# Altium PCB SLT.PcbDoc (part 1 of 8)
Units mm, origin at the board's own origin, x right, y up, seen from the top; angles counter-clockwise.
Board outline 150 x 66 mm, 6 copper layers (L1 TOP, L2 GND 1, L3 SIGNAL, L4 PWR, L5 GND 2, L6 BOT), stack 1.598 mm thick; 797 components, 541 nets, 2680 pads, 2120 vias.
Unrouted connection lines stored in the file: 31.
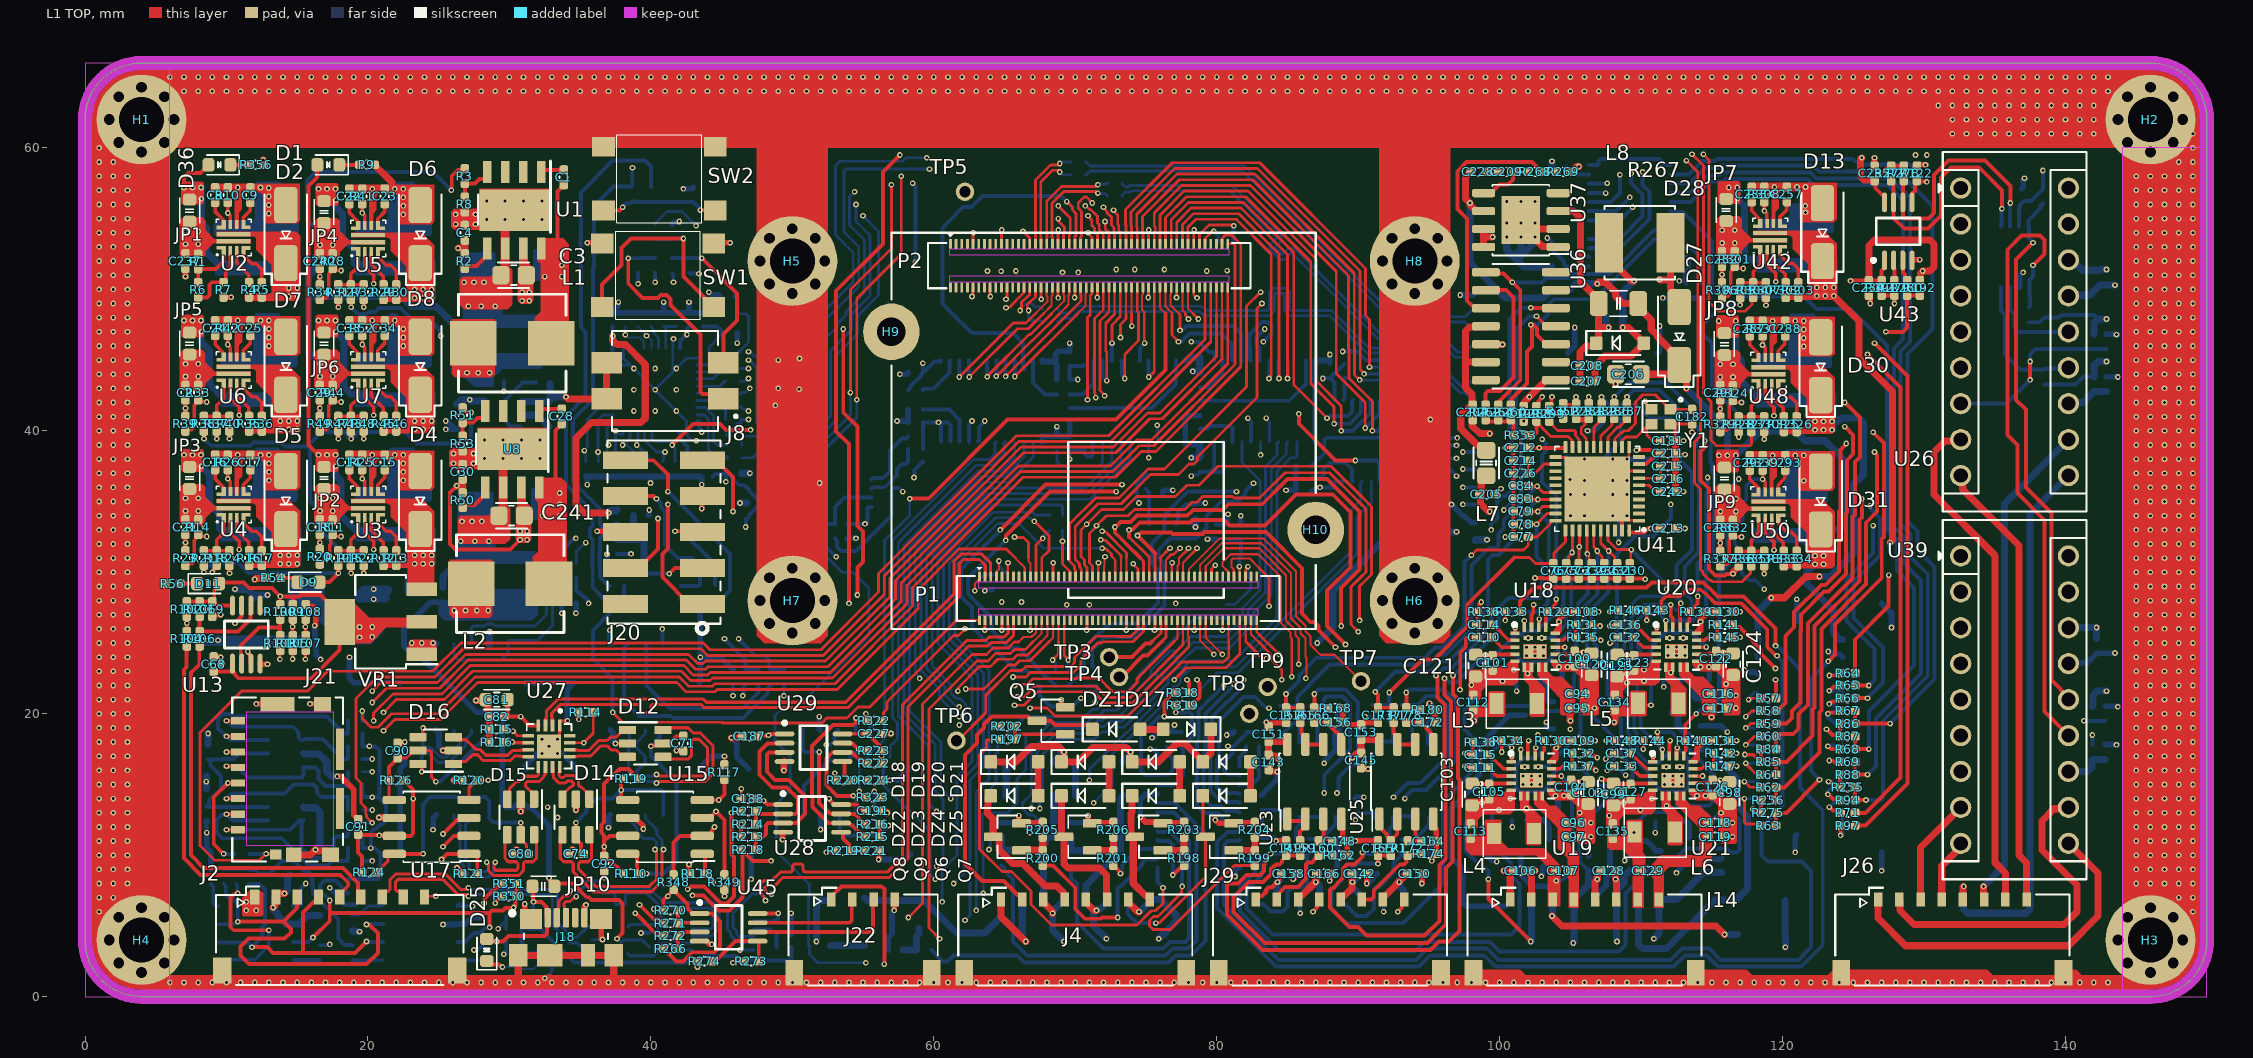
[diagram p0: L1 TOP view]
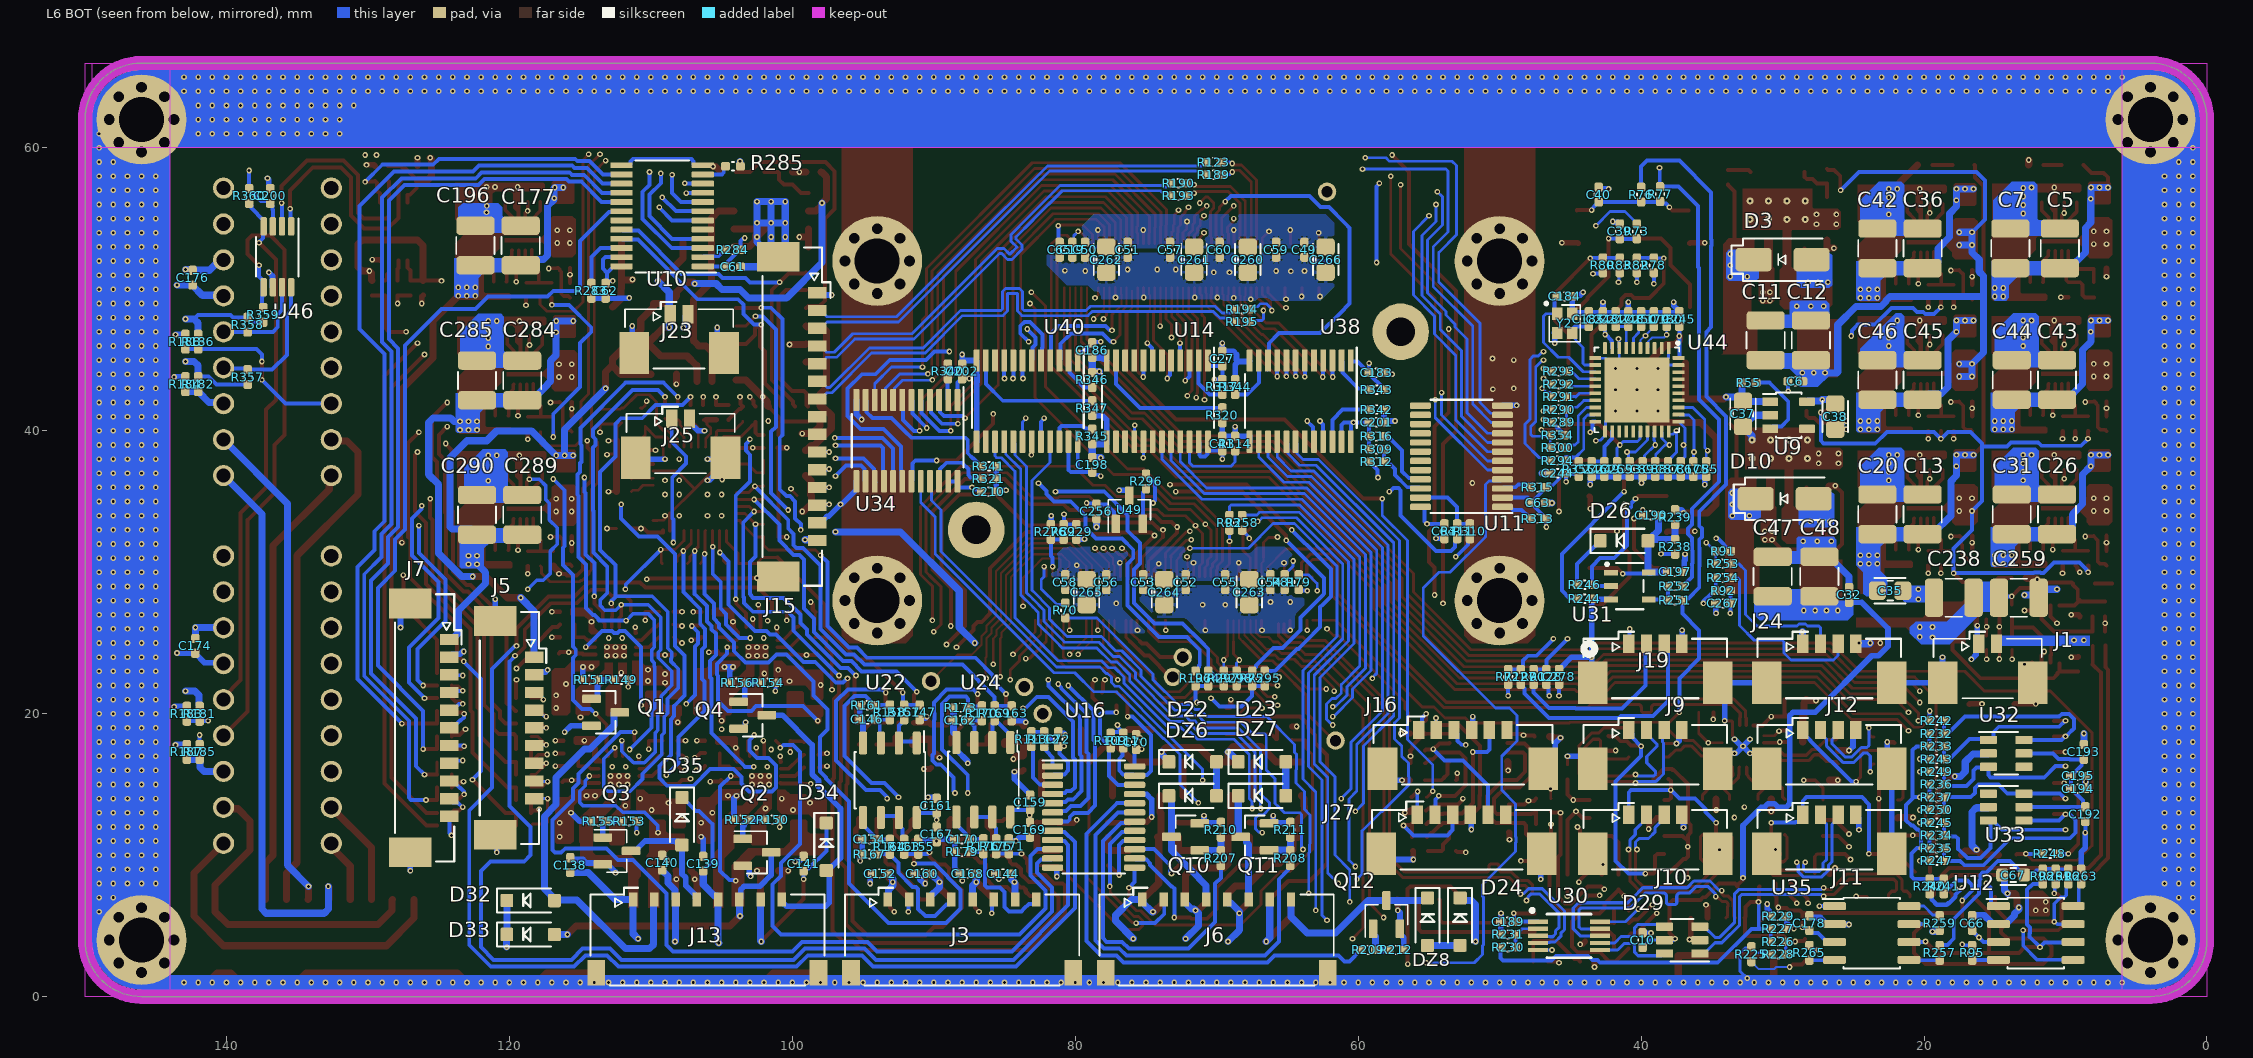
[diagram p1: L6 BOT view, seen from below]
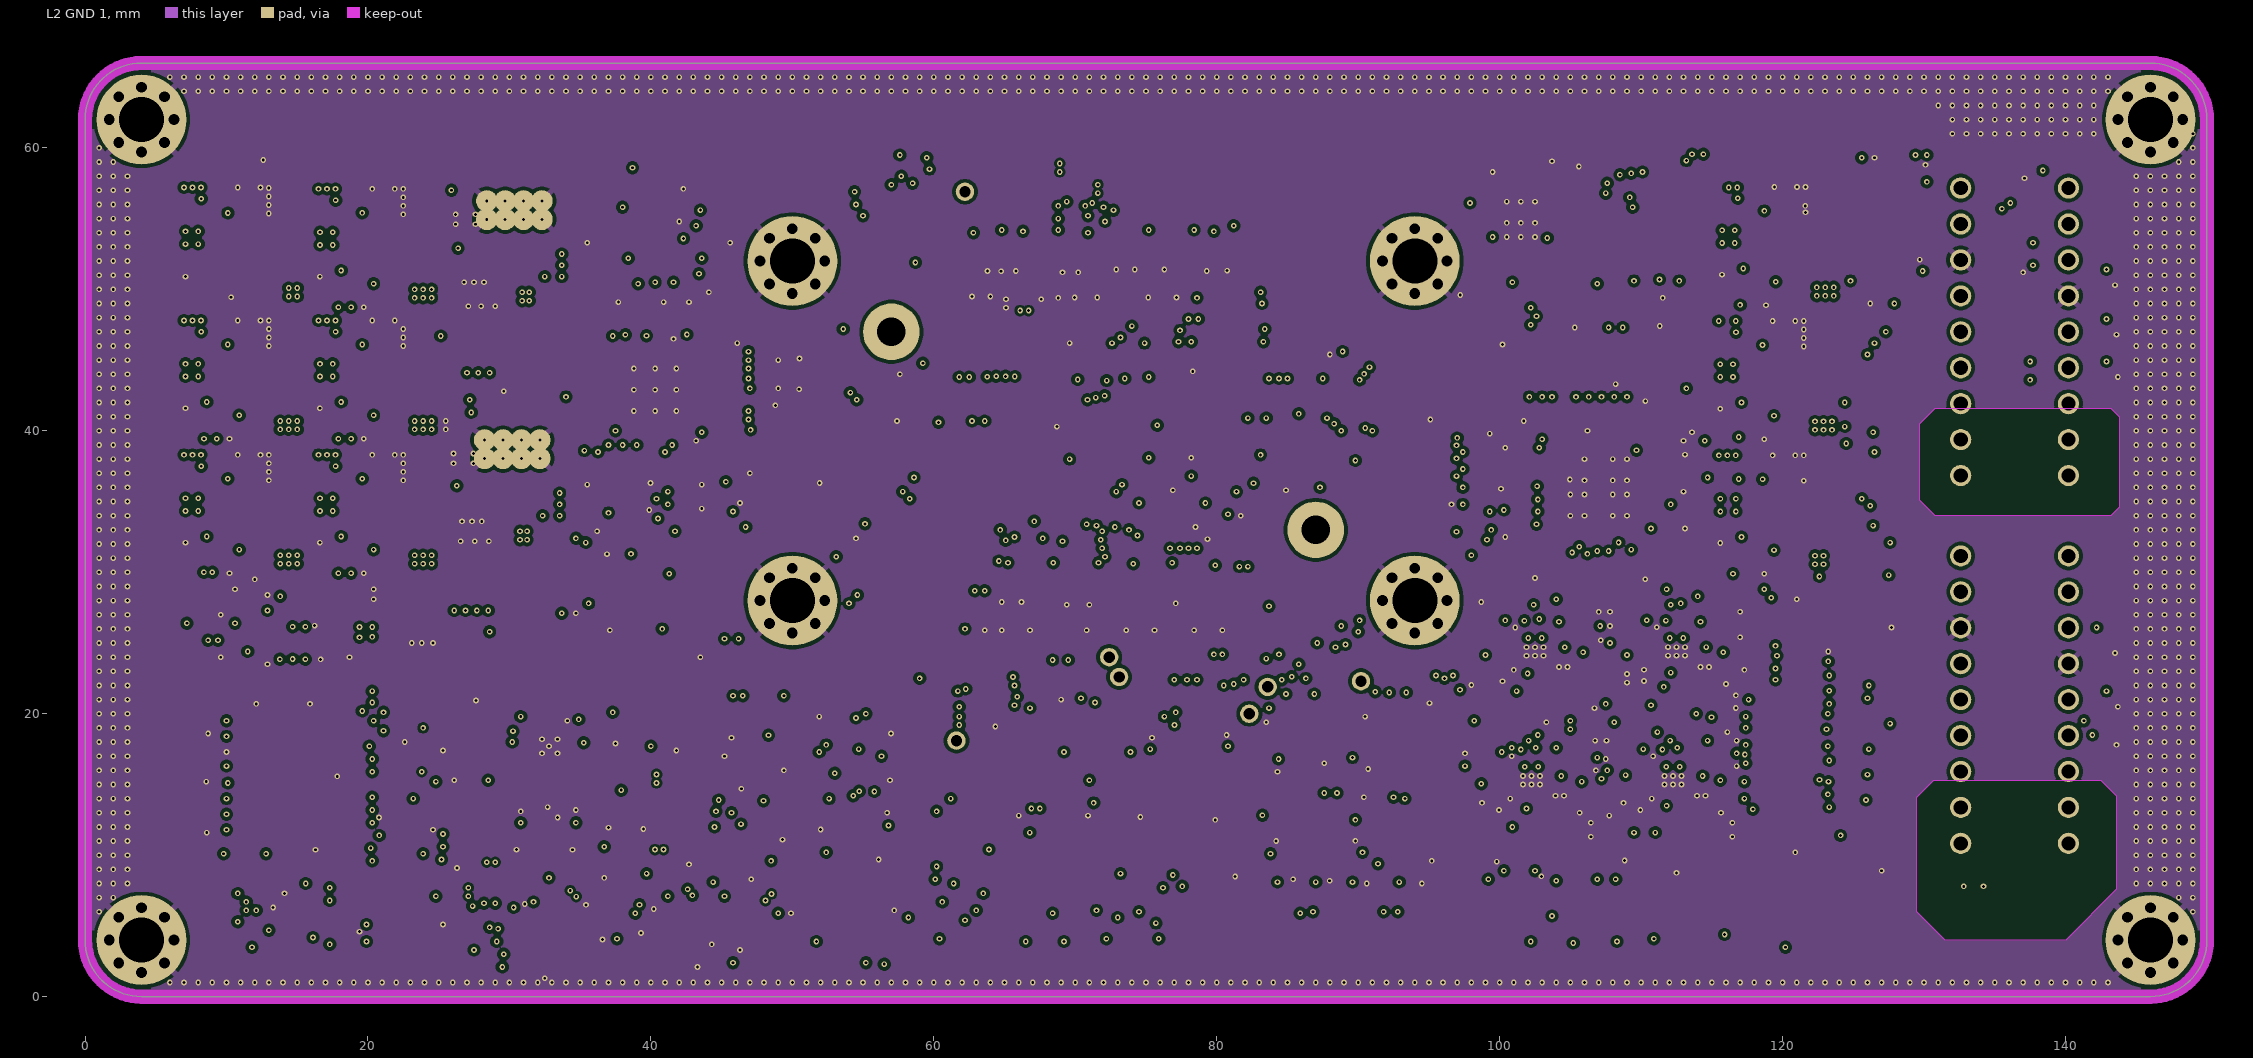
[diagram p2: L2 GND 1]
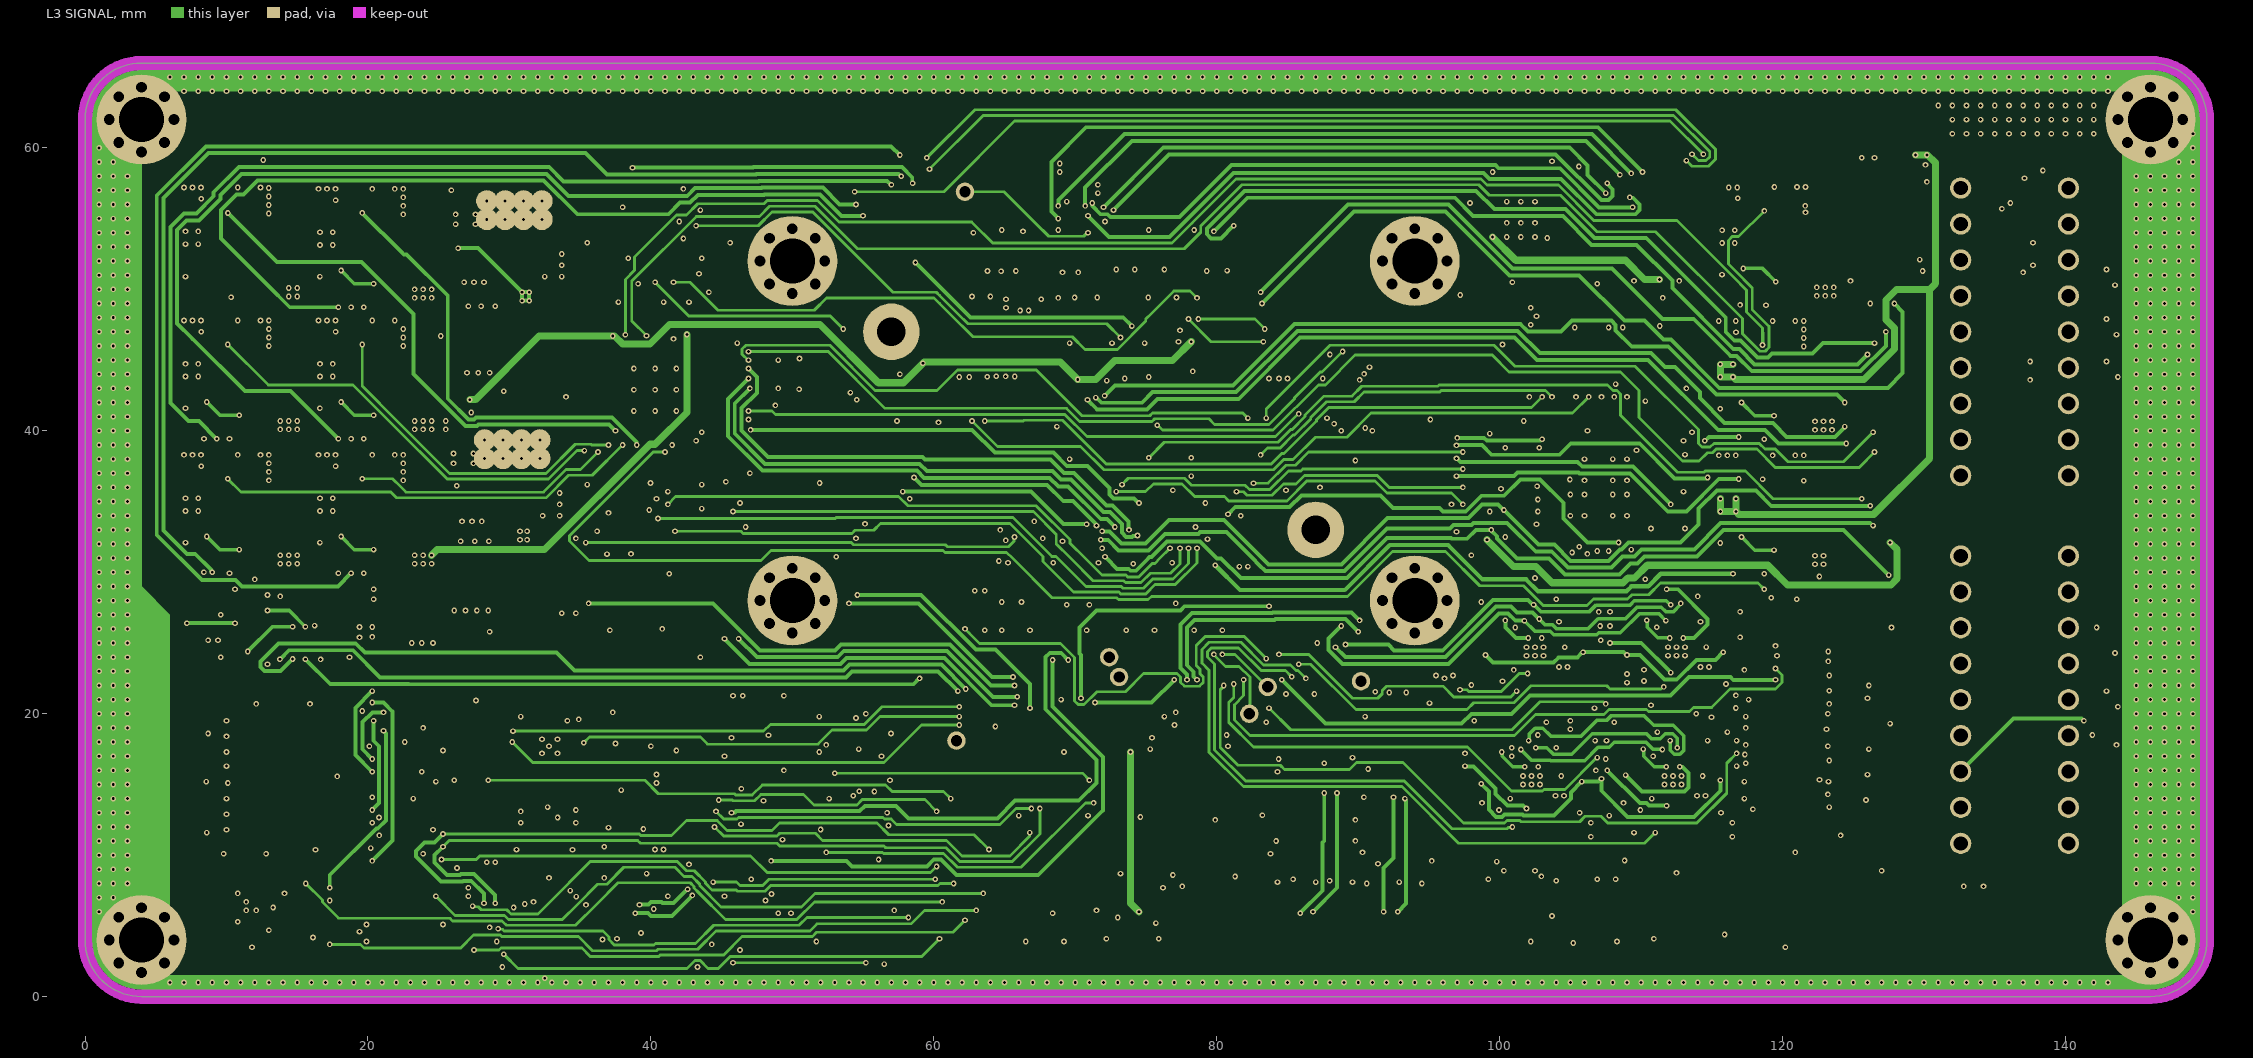
[diagram p3: L3 SIGNAL]
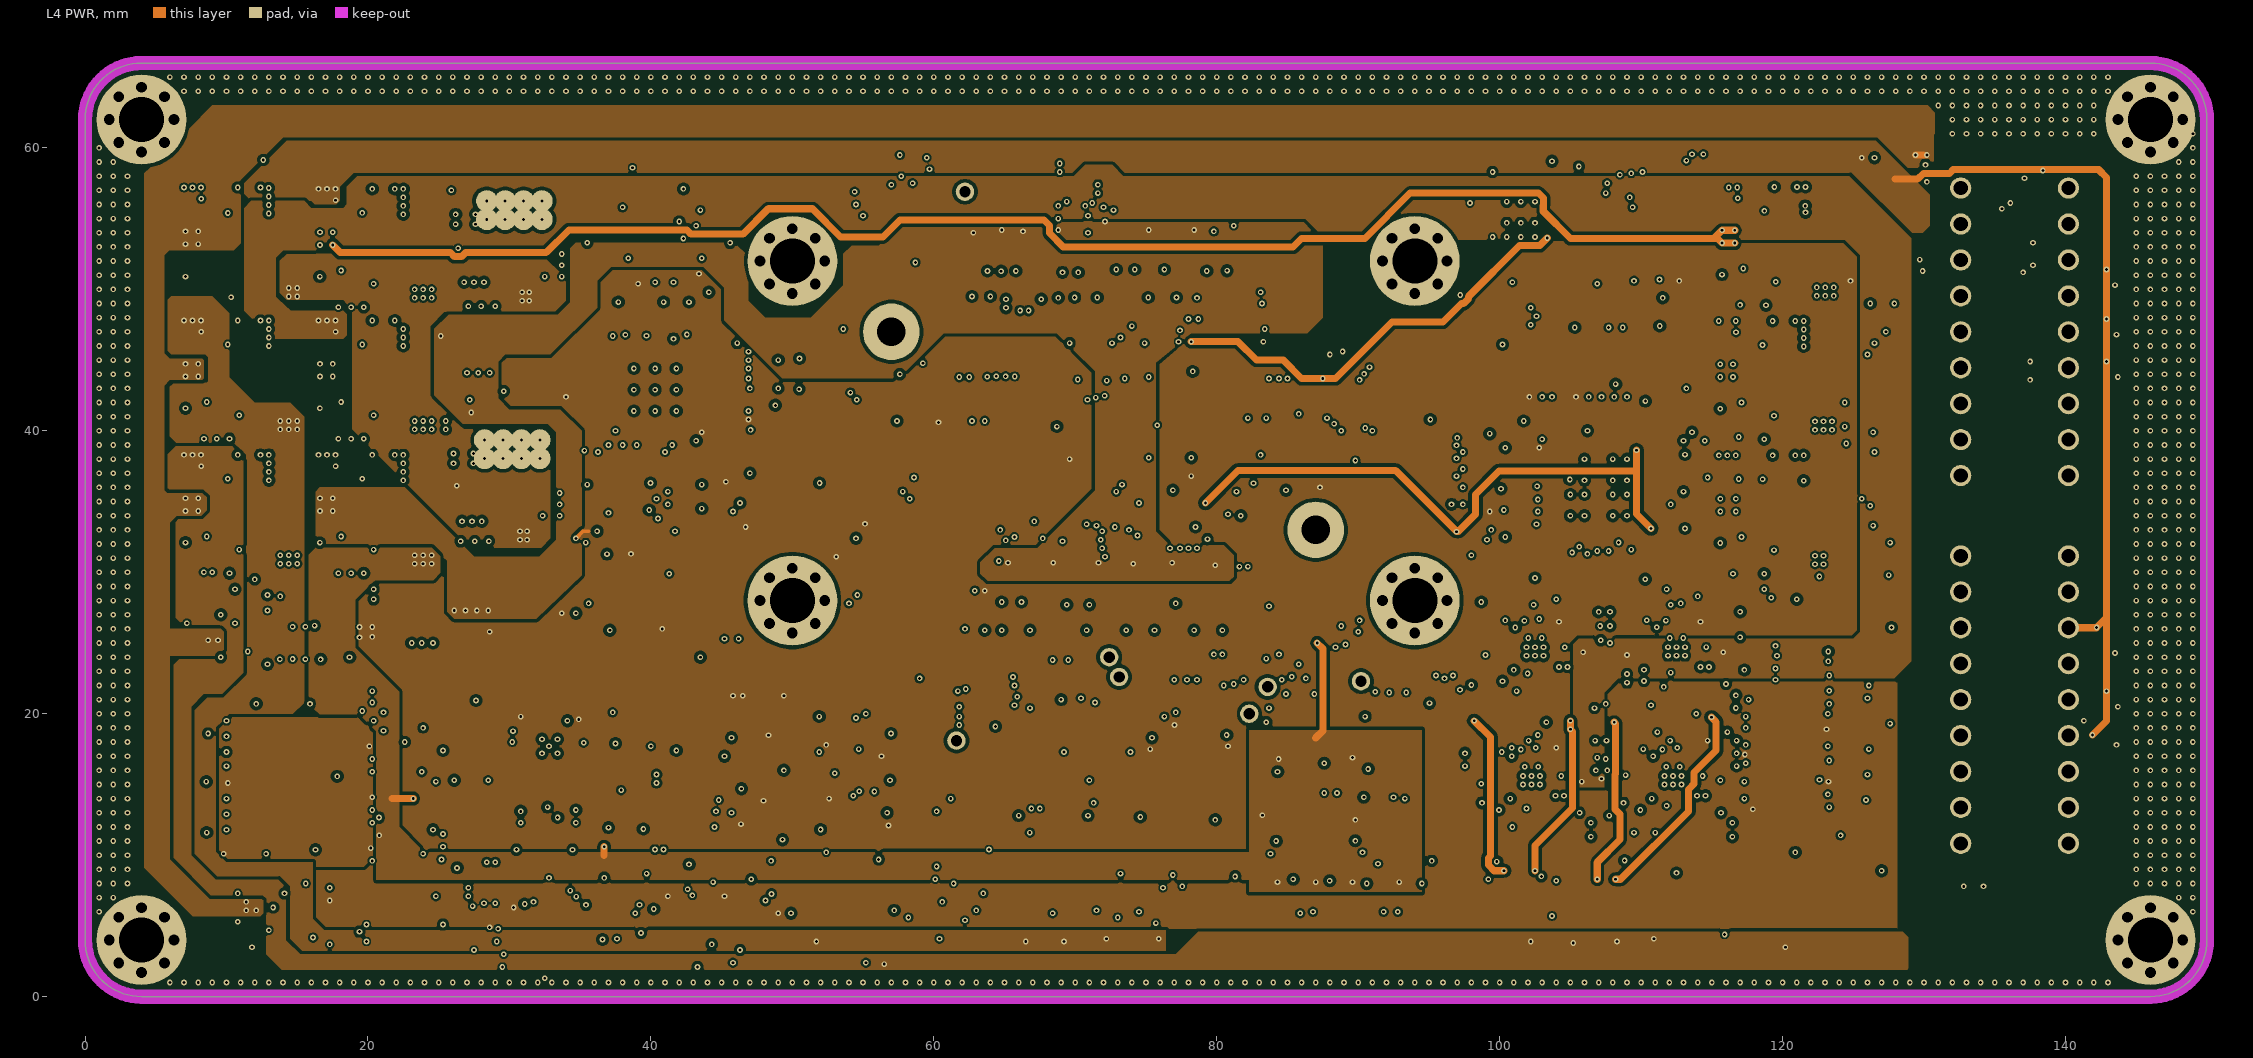
[diagram p4: L4 PWR]
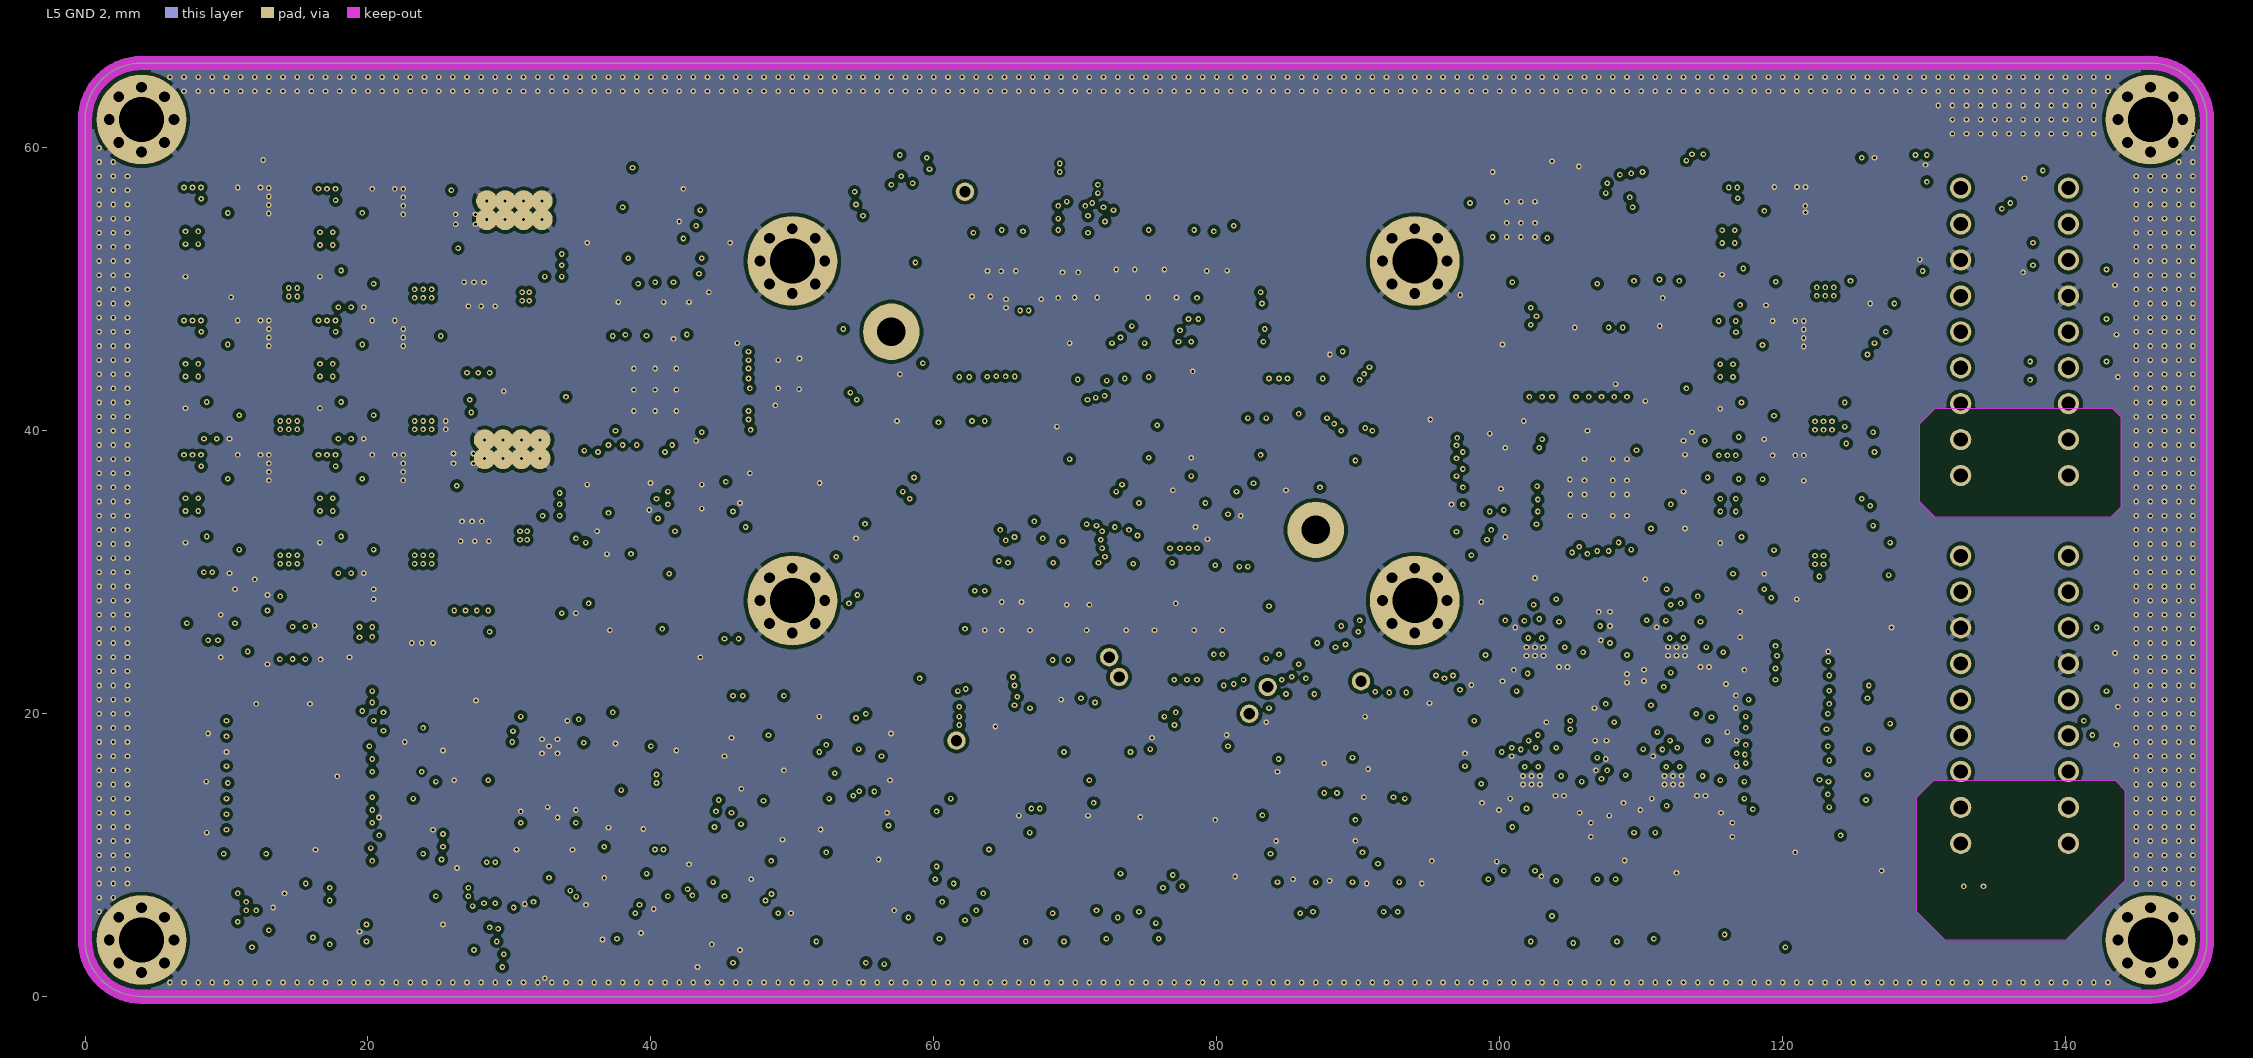
[diagram p5: L5 GND 2]

## Layer stack, top to bottom
Top Solder: solder mask 0.012, Solder Resist, Dk 4.3
L1 TOP: signal copper 0.035
Dielectric 4: prepreg 0.2, PP-006, Dk 4.48
L2 GND 1: signal copper 0.032
Dielectric 2: prepreg 0.4, PP-006, Dk 4.1
L3 SIGNAL: signal copper 0.032
Dielectric 1: dielectric 0.2, FR-4, Dk 4.2
L4 PWR: signal copper 0.032
Dielectric 3: prepreg 0.4, PP-006, Dk 4.1
L5 GND 2: signal copper 0.032
Dielectric 5: prepreg 0.2, PP-006, Dk 4.48
L6 BOT: signal copper 0.035
Bottom Solder: solder mask 0.012, Solder Resist, Dk 4.3

## Board outline
0,4 ccw(c4,4) 4,0 146,0 ccw(c146,4) 150,4 150,62 ccw(c146,62) 146,66 4,66 ccw(c4,62) 0,62
board region "Layer Stack Region 1": 0,4 0,3.738 0.068,3.218 0.204,2.711 0.405,2.227 0.667,1.773 0.986,1.357 1.357,0.986 1.773,0.667 2.227,0.405 2.711,0.204 3.218,0.068 3.738,0 4,0 146,0 146.262,0 146.782,0.068 147.289,0.204 147.773,0.405 148.227,0.667 148.643,0.986 149.014,1.357 149.333,1.773 149.595,2.227 149.796,2.711 149.932,3.218 150,3.738 150,4 150,62 150,62.262 149.932,62.782 149.796,63.289 149.595,63.773 149.333,64.227 149.014,64.643 148.643,65.014 148.227,65.333 147.773,65.595 147.289,65.796 146.782,65.932 146.262,66 146,66 4,66 3.738,66 3.218,65.932 2.711,65.796 2.227,65.595 1.773,65.333 1.357,65.014 0.986,64.643 0.667,64.227 0.405,63.773 0.204,63.289 0.068,62.782 0,62.262 0,62
board region "Cavity : J18": 38.455,6.524 29.546,6.524 29.546,-0.124 38.455,-0.124

## Design rules (kind name [scope] priority, off if disabled: settings)
BoardOutlineClearance [All] p1: gap=0.2 ignorepadtopadclearanceinfootprint=FALSE
Clearance Clearance_HD [InNetClass('HD')] p1: gap=0.55 ignorepadtopadclearanceinfootprint=FALSE
Clearance Clearance_KEEPOUT [IsKeepOut] p2: gap=0 ignorepadtopadclearanceinfootprint=FALSE
Clearance Clearance_eFUSE [(WithinRoom('ROOM_eFUSE') OR WithinRoom('ROOM_eFUSE_1') OR WithinRoom('ROOM_eFUSE_2')OR WithinRoom('ROOM_eFUSE_3')OR WithinRoom('ROOM_eFUSE_4')OR WithinRoom('ROOM_eFUSE_5')OR WithinRoom('ROOM_eFUSE_6')OR WithinRoom('ROOM_eFUSE_7')OR WithinRoom('ROOM_eFUSE_8')) and OnTopLayer] p3: gap=0.15 ignorepadtopadclearanceinfootprint=FALSE except(0.13: Via-Via; 0.19: Track-Track Track-SMDPad; 0.2: Track-THPad; 0.25: Arc-Poly Track-Poly SMDPad-Poly THPad-Poly Via-Poly Fill-Poly Poly-Poly)
Clearance Clearance_SOM [(WithinRoom('ROOM_SOM_1')  OR WithinRoom('ROOM_SOM_2') OR WithinRoom('ROOM_USB_2'))and OnTopLayer and not InAnyDifferentialPair] p4: gap=0.15 ignorepadtopadclearanceinfootprint=FALSE
Clearance "InDifferentialPairClass('DIFF100') oR InDifferentialPairClass('DIFF90')" [InDifferentialPairClass('DIFF100') oR InDifferentialPairClass('DIFF90')] p5: gap=0.15 ignorepadtopadclearanceinfootprint=FALSE except(0.19: Via-Poly; 0.2: Track-THPad THPad-Poly Via-Via; 0.254: Arc-Poly SMDPad-Poly Fill-Poly Poly-Poly; 0.3: Track-Poly)
Clearance Clearance_POWER [(InNet('+3V3_CM4') OR InNet('+3V3_CM4-OUT') OR InNet('+3V3_M2') OR InNet('+3V3_OBC') OR InNet('+5V_AUX-Adaptor') OR InNet('+5V_EXP-ISO') OR InNet('+5V_USB-Adaptor') OR InNet('+5V_EXP-ISO') OR InNet('+12V_EXP-Adaptor') OR InNet('GND') OR InNet('GND_CM4') OR InNet('GND_EXP'))] p6: gap=0.25 ignorepadtopadclearanceinfootprint=FALSE except(0.15: Arc-Via Arc-Text Arc-Hole Track-Via Track-Text Track-Hole SMDPad-SMDPad SMDPad-THPad SMDPad-Via SMDPad-Text SMDPad-Hole THPad-THPad THPad-Via THPad-Text THPad-Hole Via-Via Via-Text Via-Hole Fill-Text Poly-Text Region-Text Text-Text Text-Hole; 0.2: Arc-Arc Arc-Track Arc-SMDPad Arc-THPad Track-Track Track-SMDPad Track-THPad; 0.3: Fill-Hole Poly-Hole Region-Hole)
Clearance [NOT InNet('NetH1_1') and NOT OnLayer('Keep-Out Layer') and not InAnyDifferentialPair] p7: gap=0.15 ignorepadtopadclearanceinfootprint=FALSE except(0.13: Via-Via; 0.2: Track-Track Track-SMDPad; 0.25: Arc-Poly Track-Poly SMDPad-Poly THPad-Poly Fill-Poly Poly-Poly; 0.3: Track-THPad)
ComponentClearance [All] p1: gap=0.1 collisioncheckmode=3 verticalgap=0 showdistances=FALSE
DiffPairsRouting DiffPairs_100 [InDifferentialPairClass('DIFF100')] p1: maxlimit=0.254 minlimit=0.16 mostfreqgap=0.24 toplayer_maxgap=0.16 toplayer_prefgap=0.16 toplayer_minwidth=0.2 toplayer_maxwidth=0.2 toplayer_prefwidth=0.2 midlayer1_mingap=0.24 midlayer1_maxgap=0.24 midlayer1_minwidth=0.16 midlayer1_maxwidth=0.16 midlayer1_prefwidth=0.16 midlayer2_minwidth=0.381 midlayer2_maxwidth=0.381 midlayer2_prefwidth=0.381 midlayer3_minwidth=0.381 midlayer3_maxwidth=0.381 midlayer3_prefwidth=0.381 midlayer4_mingap=0.24 midlayer4_maxgap=0.24 midlayer4_minwidth=0.16 midlayer4_maxwidth=0.16 midlayer4_prefwidth=0.16 bottomlayer_maxgap=0.16 bottomlayer_prefgap=0.16 bottomlayer_minwidth=0.2 bottomlayer_maxwidth=0.2 bottomlayer_prefwidth=0.2 filterlayerstackid={D54526CB-8AD5-485F-8D58-B8B2ED083D53} maxuncoupledlength=12.7
DiffPairsRouting DiffPairs_90 [InDifferentialPairClass('DIFF90')] p2: maxlimit=0.16 minlimit=0.127 mostfreqgap=0.16 toplayer_mingap=0.16 toplayer_minwidth=0.22 toplayer_maxwidth=0.22 toplayer_prefwidth=0.22 midlayer1_mingap=0.16 midlayer1_minwidth=0.16 midlayer1_maxwidth=0.16 midlayer1_prefwidth=0.16 midlayer2_minwidth=0.381 midlayer2_maxwidth=0.381 midlayer2_prefwidth=0.381 midlayer3_minwidth=0.381 midlayer3_maxwidth=0.381 midlayer3_prefwidth=0.381 midlayer4_mingap=0.16 midlayer4_minwidth=0.16 midlayer4_maxwidth=0.16 midlayer4_prefwidth=0.16 bottomlayer_mingap=0.16 bottomlayer_minwidth=0.22 bottomlayer_maxwidth=0.22 bottomlayer_prefwidth=0.22 filterlayerstackid={D54526CB-8AD5-485F-8D58-B8B2ED083D53} maxuncoupledlength=50
FanoutControl Fanout_Small [(CompPinCount < 5)] p4: bgadir=Out bgaviamode=Closest fanoutstyle=Auto fanoutdirection=OutOnly viagrid=0.025 // Fanout_Small (Default Rule)
FanoutControl Fanout_Default [All] p5: bgadir=Out bgaviamode=Centered fanoutstyle=Auto fanoutdirection=OutOnly viagrid=0.025 // Fanout_Default (Default Rule)
HoleSize [All] p1: absolutevalues=TRUE maxlimit=5 minlimit=0.025 maxpercent=80.000 minpercent=20.000
MatchedLengths CSI [InxSignalClass('xSignals_CSI')] p1: tolerance=25.4 checknetsindiffpair=FALSE checkdiffpairvsdiffpair=TRUE checkxsignals=TRUE checkothers=TRUE usedelayunits=TRUE delaytolerance=5.000000
MatchedLengths DIFF_PAIR [InDifferentialPairClass('All Differential Pairs')] p2: tolerance=25.4 checknetsindiffpair=TRUE checkdiffpairvsdiffpair=FALSE checkxsignals=FALSE checkothers=FALSE usedelayunits=TRUE delaytolerance=5.000000
MinimumSolderMaskSliver [All] p1: minsoldermaskwidth=0.12
PlaneConnect PlaneConnect_1 [InNet('GND') and IsVia] p1: planeconnectstyle=Direct reliefexpansion=0.508 reliefentries=4 reliefconductorwidth=0.254 reliefairgap=0.254
PlaneConnect [not(InNet('GND') and IsVIA)] p2: planeconnectstyle=Relief reliefexpansion=0.508 reliefentries=4 reliefconductorwidth=0.254 reliefairgap=0.254
PolygonConnect PolygonConnect_1 [(InNet('+5V_USB-Adaptor') OR InNet('+3V3_CM4') OR InNet('+5V_AUX-Adaptor'))] p1: connectstyle=Direct reliefconductorwidth=0.254 reliefentries=4 polygonreliefangle="90 Angle" airgapwidth=0.254
PolygonConnect [NOT (InComponent('U4') OR InComponent('U7'))] p2: thpad.connectstyle=Relief thpad.reliefconductorwidth=0.4 thpad.reliefentries=4 thpad.polygonreliefangle="90 Angle" thpad.airgapwidth=0.254 thpad.conductorbypadedge=TRUE thpad.mindistance=0.381 thpad.enablemindistance=FALSE smdpad.connectstyle=Relief smdpad.reliefconductorwidth=0.2 smdpad.reliefentries=4 smdpad.polygonreliefangle="90 Angle" smdpad.airgapwidth=0.15 smdpad.conductorbypadedge=TRUE smdpad.mindistance=0.381 smdpad.enablemindistance=FALSE via.connectstyle=Direct via.reliefconductorwidth=0.2 via.reliefentries=4 via.polygonreliefangle="90 Angle" via.airgapwidth=0.254
RoomDefinition ROOM_SOM_2 [False] p1: confinementstyle=ConfineIn formatcopy=TRUE lockcomponents=FALSE outline 62.5,31 83,31 83,25.1 62.5,25.1
RoomDefinition ROOM_eFUSE_8 [False vs False] p2: confinementstyle=ConfineIn formatcopy=TRUE lockcomponents=FALSE outline 116.477,37.424 121.476,37.424 121.476,31.024 116.477,31.024
RoomDefinition ROOM_eFUSE_7 [False vs False] p3: confinementstyle=ConfineIn formatcopy=TRUE lockcomponents=FALSE outline 116.476,46.924 121.475,46.924 121.475,40.524 116.476,40.524
RoomDefinition ROOM_SOM_1 [False] p4: confinementstyle=ConfineIn formatcopy=TRUE lockcomponents=FALSE outline 60.4,48.3 81.4,48.3 81.4,54.7 60.4,54.7
RoomDefinition ROOM_eFUSE_6 [False vs False] p5: confinementstyle=ConfineIn formatcopy=TRUE lockcomponents=FALSE outline 116.601,56.4 121.6,56.4 121.6,50 116.601,50
RoomDefinition ROOM_eFUSE_2 [False vs False] p6: confinementstyle=ConfineIn formatcopy=TRUE lockcomponents=FALSE outline 7.601,56.6 12.901,56.6 12.901,50.1 7.601,50.1
RoomDefinition ROOM_eFUSE_1 [False vs False] p7: confinementstyle=ConfineIn formatcopy=TRUE lockcomponents=FALSE outline 7.601,47.2 12.901,47.2 12.901,40.7 7.601,40.7
RoomDefinition ROOM_eFUSE_3 [False vs False] p8: confinementstyle=ConfineIn formatcopy=TRUE lockcomponents=FALSE outline 17.2,56.535 22.408,56.535 22.408,50.035 17.2,50.035
RoomDefinition ROOM_eFUSE_4 [False vs False] p9: confinementstyle=ConfineIn formatcopy=TRUE lockcomponents=FALSE outline 17.301,47.135 22.408,47.135 22.408,40.635 17.301,40.635
RoomDefinition ROOM_eFUSE [False] p10: confinementstyle=ConfineIn formatcopy=TRUE lockcomponents=FALSE outline 7.7,37.8 12.9,37.8 12.9,31.3 7.7,31.3
RoomDefinition ROOM_eFUSE_5 [False vs False] p11: confinementstyle=ConfineIn formatcopy=TRUE lockcomponents=FALSE outline 17.301,37.6 22.3,37.6 22.3,31.2 17.301,31.2
RoutingVias [All] p1: holewidth=0.2 width=0.4 viastyle="Through Hole" minholewidth=0.2 minwidth=0.4 maxholewidth=1 maxwidth=2
SilkToSilkClearance [All] p1: silktosilkclearance=0.125
SilkToSolderMaskClearance [IsPad] p1: minsilkscreentomaskgap=0.1 clearancetoexposedcopper=TRUE
SolderMaskExpansion [All] p1: expansion=0.102 istentingtop=FALSE
SupplyNets "Schematic Supply Nets_11" [InNet('+12V_Photo')] p1: voltage=0.000
SupplyNets "Schematic Supply Nets_8" [InNet('+12V_Laser')] p2: voltage=0.000
SupplyNets "Schematic Supply Nets_9" [InNet('+5V_CAM')] p3: voltage=0.000
SupplyNets "Schematic Supply Nets_28" [InNet('+5V_TEC')] p4: voltage=0.000
SupplyNets "Schematic Supply Nets_27" [InNet('+3.3V_DAC_REF')] p5: voltage=0.000
SupplyNets "Schematic Supply Nets_26" [InNet('+VCC_SD')] p6: voltage=0.000
SupplyNets "Schematic Supply Nets_25" [InNet('+12V')] p7: voltage=0.000
SupplyNets "Schematic Supply Nets_24" [InNet('+1.8V')] p8: voltage=0.000
SupplyNets "Schematic Supply Nets_23" [InNet('+12V_IN')] p9: voltage=0.000
SupplyNets "Schematic Supply Nets_22" [InNet('+5V_HD4')] p10: voltage=0.000
SupplyNets "Schematic Supply Nets_21" [InNet('+12V_Solenoid')] p11: voltage=0.000
SupplyNets "Schematic Supply Nets_20" [InNet('+5V_OUT')] p12: voltage=0.000
SupplyNets "Schematic Supply Nets_17" [InNet('+V_BAT_RTC')] p13: voltage=0.000
SupplyNets "Schematic Supply Nets_7" [InNet('+JTAG_POWER')] p14: voltage=0.000
SupplyNets "Schematic Supply Nets_6" [InNet('NTC1+')] p15: voltage=0.000
SupplyNets "Schematic Supply Nets_5" [InNet('+VSD_3V3')] p16: voltage=0.000
SupplyNets "Schematic Supply Nets_4" [InNet('+3.3V')] p17: voltage=0.000
SupplyNets "Schematic Supply Nets_2" [InNet('HEATER_A_1')] p18: voltage=0.000
SupplyNets "Schematic Supply Nets" [InNet('+5V_SOM')] p19: voltage=0.000
SupplyNets "Schematic Supply Nets_3" [InNet('GND')] p20: voltage=0.000
Width Width_SOM [(WithinRoom('ROOM_SOM_1')  OR WithinRoom('ROOM_SOM_2') OR WithinRoom('ROOM_USB_2'))and OnTopLayer and not InAnyDifferentialPair] p1: maxlimit=0.2 minlimit=0.15 preferedwidth=0.2 midlayer1_minwidth=0.2 midlayer2_minwidth=0.2 midlayer3_minwidth=0.2 midlayer4_minwidth=0.2 bottomlayer_minwidth=0.2 minimp=50.000000 maximp=50.000000 favimp=50.000000
Width Width_eFUSE [(WithinRoom('ROOM_eFUSE') OR WithinRoom('ROOM_eFUSE_1') OR WithinRoom('ROOM_eFUSE_2')OR WithinRoom('ROOM_eFUSE_3')OR WithinRoom('ROOM_eFUSE_4')OR WithinRoom('ROOM_eFUSE_5')OR WithinRoom('ROOM_eFUSE_6')OR WithinRoom('ROOM_eFUSE_7')OR WithinRoom('ROOM_eFUSE_8'))and OnTopLayer] p2: maxlimit=0.254 minlimit=0.25 preferedwidth=0.254 toplayer_maxwidth=0.25 toplayer_prefwidth=0.25 midlayer1_minwidth=0.254 midlayer2_minwidth=0.254 midlayer3_minwidth=0.254 midlayer4_minwidth=0.254 bottomlayer_minwidth=0.254 minimp=50.000000 maximp=50.000000 favimp=50.000000
Width Width_POWER [(InNet('+3V3_CM4') OR InNet('+3V3_CM4-OUT') OR InNet('+3V3_M2') OR InNet('+3V3_OBC') OR InNet('+5V_AUX-Adaptor') OR InNet('+5V_EXP-ISO') OR InNet('+5V_USB-Adaptor') OR InNet('+5V_EXP-ISO') OR InNet('+12V_EXP-Adaptor') OR InNet('GND') OR InNet('GND_CM4') OR InNet('GND_EXP') OR InNet('EDGE-PLATING'))] p3: maxlimit=1.5 minlimit=0.2 preferedwidth=0.4
Width [All] p4: maxlimit=0.5 minlimit=0.15 preferedwidth=0.28 midlayer1_minwidth=0.28 midlayer1_maxwidth=0.28 midlayer2_minwidth=0.2 midlayer3_minwidth=0.28 midlayer4_minwidth=0.28 midlayer4_maxwidth=0.28 minimp=50.000000 maximp=50.000000 favimp=50.000000
21 further rules are at their usual default settings.

## Classes and differential pairs
net class HD: HD_2_P1+ HD_2_P1- HD_2_P2+ HD_2_P2- HD_P1+ HD_P1- HD_P2+ HD_P2-
differential pair class DIFF100: CAM_CK CAM_D0 CAM_D1 SOM_CAM_CK SOM_CAM_D0 SOM_CAM_D1
component class POWER_2: C177 C196 C232 C233 C257 C284 C285 C286 C287 C288 C289 C290 C291 C292 C293 D13 D30 D31 JP7 JP8 JP9 R301 R302 R303 R304 R305 R306 R307 R308 R324 R325 R326 R327 R328 R329 R330 R331 R332 R333 R334 R335 R336 R337 R338 R339 U42 U48 U50
component class SOM_Console: C267 C278 J19 J24 R72 R90 R91 R92 R127 R128 R253 R254
component class IO_EXPAND: C27 C41 C61 C62 C63 C64 C70 C72 C183 C186 C198 C201 C202 C210 R109 R111 R112 R113 R283 R284 R285 R309 R310 R311 R312 R313 R314 R315 R316 R317 R318 R319 R320 R321 R340 R341 R342 R343 R344 R345 R346 R347 U10 U11 U14 U16 U34 U38 U40
component class ADC: C73 C75 C76 C77 C78 C79 C83 C84 C85 C86 C87 C88 C89 C93 C175 C179 C180 C181 C182 C184 C185 C211 C212 C213 C214 C215 C216 C226 C230 C231 C236 C239 C242 C243 C244 C245 C246 C247 C248 C249 C250 C255 C256 R125 R281 R282 R286 R287 R288 R289 R290 R291 R292 R293 R294 R296 R299 R300 R352 R353 R354 R355 U41 U44 U49 Y1 Y2
component class LED: C199 C204 C205 C206 C207 C208 C209 C228 D27 D28 J23 L7 L8 R260 R262 R264 R267 R268 R269 U36 U37
differential pair class DIFF90: BOOT_USB_D CONN_USB CONN_USB_1 CONN_USB_1_R CONN_USB_2 CONN_USB_2_R CONN_USB_3 CONN_USB_3_R CONN_USB_4 CONN_USB_4_R CONSOLE_1 CONSOLE_2 CONSOLE_USB SOM_USB_USB2 USB1 USB_D
component class SOM_BOOT: C189 C190 C192 C193 C194 C195 C197 D25 D26 J18 J20 J21 JP10 R225 R226 R227 R228 R229 R230 R231 R232 R233 R234 R235 R236 R237 R238 R239 R240 R241 R242 R243 R244 R245 R246 R247 R248 R249 R250 R251 R252 U30 U31 U32 U33
component class CONNECTOR: C10 D29 J2 J3 J4 J5 J6 J7 J13 J14 J15 J29 R57 R58 R59 R60 R61 R62 R63 R64 R65 R66 R67 R68 R69 R70 R71 R74 R75 R84 R85 R86 R87 R88 R94 R97 R123 R189 R190 R193 R194 R195 R196 R255 R256 R275 R295 R297 R298
component class TEC: C94 C95 C96 C97 C98 C99 C100 C101 C102 C103 C104 C105 C106 C107 C108 C109 C110 C111 C112 C113 C114 C115 C116 C117 C118 C119 C120 C121 C122 C123 C124 C125 C126 C127 C128 C129 C130 C131 C132 C133 C134 C135 C136 C137 L3 L4 L5 L6 R129 R130 R131 R132 R133 R134 R135 R136 R137 R138 R139 R140 R141 R142 R143 R144 R145 R146 R147 R148 U18 U19 U20 U21
component class SOM_POWER: * C19 C39 C40 C49 C50 C51 C52 C53 C54 C55 C56 C57 C58 C59 C60 C65 C260 C261 C262 C263 C264 C265 C266 J8 P1 P2 R73 R76 R77 R78 R79 R80 R81 R82 R83 SW1 SW2 SW? TP3 TP4 TP5 TP6 TP7 TP8 TP9
component class POWER: C1 C2 C3 C4 C5 C6 C7 C8 C9 C11 C12 C13 C14 C15 C16 C17 C18 C20 C21 C22 C23 C24 C25 C26 C28 C29 C30 C31 C32 C33 C34 C35 C36 C37 C38 C42 C43 C44 C45 C46 C47 C48 C237 C238 C240 C241 C259 D1 D2 D3 D4 D5 D6 D7 D8 D9 D10 D11 D36 J1 JP1 JP2 JP3 JP4 JP5 JP6 JP? L1 L2 R1 R2 R3 R4 R5 R6 R7 R8 R9 R10 R11 R12 R13 R14 R15 R16 R17 R18 R19 R20 R21 R22 R23 R24 R25 R26 R27 R28 R29 R30 R31 R32 R33 R34 R35 R36 R37 R38 R39 R40 R41 R42 R43 R44 R45 R46 R47 R48 R49 R50 R51 R52 R53 R54 R55 R56 R356 TVS? U1 U2 U3 U4 U5 U6 U7 U8 U9 VR1
component class NTC: C142 C143 C144 C145 C146 C147 C148 C149 C150 C151 C152 C153 C154 C155 C156 C157 C158 C159 C160 C161 C162 C163 C164 C165 C166 C167 C168 C169 C170 C171 C172 C173 R157 R158 R159 R160 R161 R162 R163 R164 R165 R166 R167 R168 R169 R170 R171 R172 R173 R174 R175 R176 R177 R178 R179 R180 U22 U23 U24 U25
component class USB: C71 C74 C80 C81 C82 C90 C91 C92 C229 D12 D14 D15 D16 J9 J10 J11 J12 J25 R89 R110 R114 R115 R116 R117 R118 R119 R120 R121 R124 R126 R276 R348 R349 R350 R351 U15 U17 U27
component class I2C_Sensor: C187 C188 C191 C227 J16 J22 J27 R213 R214 R215 R216 R217 R218 R219 R220 R221 R222 R223 R224 R266 R270 R271 R272 R273 R274 R322 R323 U28 U29 U45
component class HEATER: C138 C139 C140 C141 D32 D33 D34 D35 Q1 Q2 Q3 Q4 R149 R150 R151 R152 R153 R154 R155 R156
component class FLUIDIC_CTRL: C174 C176 C200 C234 C235 D17 D18 D19 D20 D21 D22 D23 D24 DZ1 DZ2 DZ3 DZ4 DZ5 DZ6 DZ7 DZ8 H1 H2 H3 H4 H5 H6 H7 H8 H9 H10 J26 Q5 Q6 Q7 Q8 Q9 Q10 Q11 Q12 R122 R181 R182 R183 R184 R185 R186 R187 R188 R191 R192 R197 R198 R199 R200 R201 R202 R203 R204 R205 R206 R207 R208 R209 R210 R211 R212 R277 R278 R279 R280 R357 R358 R359 R360 U26 U39 U43 U46
component class CAN_I2C: C66 C67 C68 C69 C178 R93 R95 R96 R98 R99 R100 R101 R102 R103 R104 R105 R106 R107 R108 R257 R258 R259 R261 R263 R265 U12 U13 U35
differential pair SOM_CAM_D1: +SOM_CAM_D1_P -SOM_CAM_D1_N
differential pair SOM_CAM_D0: +SOM_CAM_D0_P -SOM_CAM_D0_N
differential pair SOM_CAM_CK: +SOM_CAM_CK_P -SOM_CAM_CK_N
differential pair CAM_D1: +CAM_D1_P -CAM_D1_N
differential pair CAM_D0: +CAM_D0_P -CAM_D0_N
differential pair CAM_CK: +CAM_CK_P -CAM_CK_N
differential pair SOM_USB_USB2: +SOM_USB_USB2_P -SOM_USB_USB2_N
differential pair CONN_USB: +CONN_USB_P -CONN_USB_N
differential pair CONN_USB_4: +CONN_USB_4_P -CONN_USB_4_N
differential pair CONN_USB_4_R: +CONN_USB_4_R_P -CONN_USB_4_R_N
differential pair CONN_USB_3: +CONN_USB_3_P -CONN_USB_3_N
differential pair CONN_USB_3_R: +CONN_USB_3_R_P -CONN_USB_3_R_N
differential pair CONN_USB_2: +CONN_USB_2_P -CONN_USB_2_N
differential pair CONN_USB_2_R: +CONN_USB_2_R_P -CONN_USB_2_R_N
differential pair CONN_USB_1: +CONN_USB_1_P -CONN_USB_1_N
differential pair CONN_USB_1_R: +CONN_USB_1_R_P -CONN_USB_1_R_N
differential pair USB_D: +USB_D_P -USB_D_N
differential pair USB1: +USB1_P -USB1_N
differential pair BOOT_USB_D: +BOOT_USB_D_P -BOOT_USB_D_N

## Components (designator, comment, footprint, x,y, rotation, side; value= is the part's Value field where it differs from the comment)
C1 "0.01uF/20V" CAP_C_1005X60 33.85,57.925 r90 top
C2 "1uF/20V" CAP_C_1005X60 7.1,42.7 r90 top
C3 "10uF/20V" CAP_C_2012X110 30.3,51 r180 top
C4 "0.01uF/20V" CAP_C_1005X60 26.85,54 r270 top
C5 "100uF/20V" CAP_C_3225X80 10.4,52.9 r270 bottom
C6 "0.01uF/20V" CAP_C_1005X60 29.1,43.5 r180 bottom
C7 "100uF/20V" CAP_C_3225X80 13.9,52.9 r270 bottom
C8 "2.2nF/10V" CAP_C_1005X60 9.193,56.665 r270 top
C9 "2.2nF/10V" CAP_C_1005X60 11.693,56.665 r270 top
C10 "0.1uF/10V" CAP_C_1005X60 39.9,4 r270 bottom
C11 "100uF/20V" CAP_C_3225X80 31.2,46.4 r270 bottom
C12 "100uF/20V" CAP_C_3225X80 28,46.4 r270 bottom
C13 "100uF/20V" CAP_C_3225X80 20.1,34.1 r270 bottom
C14 "2.2nF/10V" CAP_C_1005X60 18.693,37.765 r270 top
C15 "2.2nF/10V" CAP_C_1005X60 21.193,37.765 r270 top
C16 "2.2nF/10V" CAP_C_1005X60 9.193,37.765 r270 top
C17 "2.2nF/10V" CAP_C_1005X60 11.693,37.765 r270 top
C18 "1uF/20V" CAP_C_1005X60 16.6,33.2 r90 top
C19 "150p/10V" CAP_C_1005X60 80.2,52.8 r270 bottom
C20 "100uF/20V" CAP_C_3225X80 23.3,34.1 r270 bottom
C21 "1uF/20V" CAP_C_1005X60 7.1,33.2 r90 top
C22 "2.2nF/10V" CAP_C_1005X60 18.693,56.565 r270 top
C23 "2.2nF/10V" CAP_C_1005X60 21.193,56.565 r270 top
C24 "2.2nF/10V" CAP_C_1005X60 9.193,47.265 r270 top
C25 "2.2nF/10V" CAP_C_1005X60 11.693,47.265 r270 top
C26 "100uF/20V" CAP_C_3225X80 10.6,34.1 r270 bottom
C27 "0.1uF/10V" CAP_C_1005X60 69.6,45.1 r270 bottom
C28 "0.01uF/20V" CAP_C_1005X60 33.7,41.025 r90 top
C29 "1uF/20V" CAP_C_1005X60 16.6,42.7 r90 top
C30 "0.01uF/20V" CAP_C_1005X60 26.7,37.1 r270 top
C31 "100uF/20V" CAP_C_3225X80 13.8,34.1 r270 bottom
C32 "0.01uF/20V" CAP_C_1005X60 25.3,28.4 r270 bottom
C33 "2.2nF/10V" CAP_C_1005X60 18.693,47.265 r270 top
C34 "2.2nF/10V" CAP_C_1005X60 21.193,47.265 r270 top
C35 "10uF/20V" CAP_C_2012X110 22.4,28.7 r180 bottom
C36 "100uF/20V" CAP_C_3225X80 20.1,52.9 r270 bottom
C37 "10uF/20V" CAP_C_2012X110 32.8,41.2 r270 bottom
C38 "10uF/20V" CAP_C_2012X110 26.275,41 r270 bottom
C39 "0.1uF/10V" CAP_C_1005X60 41.5,54.1 r270 bottom
C40 "0.1uF/10V" CAP_C_1005X60 43,56.7 r270 bottom
C41 "0.1uF/10V" CAP_C_1005X60 69.6,39.1 r270 bottom
C42 "100uF/20V" CAP_C_3225X80 23.3,52.9 r270 bottom
C43 "100uF/20V" CAP_C_3225X80 10.6,43.6 r270 bottom
C44 "100uF/20V" CAP_C_3225X80 13.8,43.6 r270 bottom
C45 "100uF/20V" CAP_C_3225X80 20.1,43.6 r270 bottom
C46 "100uF/20V" CAP_C_3225X80 23.3,43.6 r270 bottom
C47 "100uF/20V" CAP_C_3225X80 30.7,29.7 r270 bottom
C48 "100uF/20V" CAP_C_3225X80 27.4,29.7 r270 bottom
C49 "0.1uF/10V" CAP_C_1005X60 63.8,52.8 r90 bottom
C50 "0.1uF/10V" CAP_C_1005X60 79.3,52.8 r90 bottom
C51 "0.1uF/10V" CAP_C_1005X60 76.3,52.8 r90 bottom
C52 "0.1uF/10V" CAP_C_1005X60 72.2,29.3 r90 bottom
C53 "0.1uF/10V" CAP_C_1005X60 75.2,29.3 r90 bottom
C54 "0.1uF/10V" CAP_C_1005X60 66.2,29.3 r90 bottom
C55 "0.1uF/10V" CAP_C_1005X60 69.4,29.3 r90 bottom
C56 "0.1uF/10V" CAP_C_1005X60 77.8,29.3 r90 bottom
C57 "0.1uF/10V" CAP_C_1005X60 73.3,52.8 r90 bottom
C58 "0.1uF/10V" CAP_C_1005X60 80.7,29.3 r90 bottom
C59 "0.1uF/10V" CAP_C_1005X60 65.8,52.8 r90 bottom
C60 "0.1uF/10V" CAP_C_1005X60 69.8,52.8 r90 bottom
C61 "0.1uF/10V" CAP_C_1005X60 104.2,51.6 r0 bottom
C62 "0.1uF/10V" CAP_C_1005X60 113.2,49.9 r90 bottom
C63 "0.1uF/10V" CAP_C_1005X60 47.3,34.9 r0 bottom
C64 "0.1uF/10V" CAP_C_1005X60 53.9,32.9 r90 bottom
C65 "150p/10V" CAP_C_1005X60 81.1,52.8 r270 bottom
C66 "0.1uF/10V" CAP_C_1005X60 16.6,5.2 r270 bottom
C67 "4.7uF/10V" CAP_C_1608X80 13.7,8.6 r180 bottom
C68 "0.1uF/10V" CAP_C_1005X60 9.1,23.5 r270 top
C69 "0.1uF/10V" CAP_C_1005X60 9,27.4 r270 top
C70 "0.1uF/10V" CAP_C_1005X60 75.7,18 r270 bottom
C71 "0.1uF/10V" CAP_C_1005X60 42.3,17.9 r90 top
C72 "0.1uF/10V" CAP_C_1005X60 81.2,18.2 r270 bottom
C73 "150pF/10V" CAP_C_1005X60 105.6,30.1 r90 top
C74 "0.1uF/10V" CAP_C_1005X60 34.7,10.1 r0 top
C75 "150pF/10V" CAP_C_1005X60 104.7,30.1 r90 top
C76 "150pF/10V" CAP_C_1005X60 103.8,30.1 r90 top
C77 "150pF/10V" CAP_C_1005X60 101.5,32.5 r0 top
C78 "150pF/10V" CAP_C_1005X60 101.5,33.4 r0 top
C79 "150pF/10V" CAP_C_1005X60 101.5,34.3 r0 top
C80 "0.1uF/10V" CAP_C_1005X60 30.8,10.1 r0 top
C81 "4.7uF/10V" CAP_C_1608X80 29.1,21 r0 top
C82 "0.1uF/10V" CAP_C_1005X60 29.1,19.8 r0 top
C83 "150pF/10V" CAP_C_1005X60 101.5,35.2 r0 top
C84 "150pF/10V" CAP_C_1005X60 101.5,36.1 r0 top
C85 "150pF/10V" CAP_C_1005X60 35.4,37.3 r90 bottom
C86 "150pF/10V" CAP_C_1005X60 37.2,37.3 r90 bottom
C87 "150pF/10V" CAP_C_1005X60 38.1,37.3 r90 bottom
C88 "150pF/10V" CAP_C_1005X60 39,37.3 r90 bottom
C89 "150pF/10V" CAP_C_1005X60 39.9,37.3 r90 bottom
C90 "0.1uF/10V" CAP_C_1005X60 22.1,17.4 r270 top
C91 "0.1uF/10V" CAP_C_1005X60 19.3,12 r270 top
C92 "0.1uF/10V" CAP_C_1005X60 36.7,9.4 r90 top
C93 "150pF/10V" CAP_C_1005X60 40.8,37.3 r90 bottom
C94 "47nF/10V" CAP_C_1005X60 105.5,21.4 r180 top
C95 "47nF/10V" CAP_C_1005X60 105.5,20.4 r180 top
C96 "47nF/10V" CAP_C_1005X60 105.25,12.3 r180 top
C97 "47nF/10V" CAP_C_1005X60 105.25,11.3 r180 top
C98 "4.7uF/10V" CAP_C_1608X80 116.25,14.4 r90 top
C99 "4.7uF/10V" CAP_C_1608X80 108.05,14.3 r90 top
C100 "0.1uF/10V" CAP_C_1005X60 105.3,23.9 r90 top
C101 "0.1uF/10V" CAP_C_1005X60 99.5,23.6 r90 top
C102 "4.7uF/10V" CAP_C_1608X80 106.25,14.4 r90 top
C103 "4.7uF/10V" CAP_C_1608X80 98.05,14.3 r90 top
C104 "0.1uF/10V" CAP_C_1005X60 105.05,14.8 r90 top
C105 "0.1uF/10V" CAP_C_1005X60 99.25,14.5 r90 top
C106 "47nF/10V" CAP_C_1005X60 101.5,8.9 r0 top
C107 "47nF/10V" CAP_C_1005X60 104.5,8.9 r0 top
C108 "0.1uF/10V" CAP_C_1005X60 105.9,27.2 r180 top
C109 "0.1uF/10V" CAP_C_1005X60 105.65,18.1 r180 top
C110 "0.1uF/10V" CAP_C_1005X60 98.9,25.4 r0 top
C111 "0.1uF/10V" CAP_C_1005X60 98.65,16.2 r0 top
C112 "1uF/10V" CAP_C_1005X60 98.15,20.8 r270 top
C113 "1uF/10V" CAP_C_1005X60 97.95,11.7 r270 top
C114 "1uF/10V" CAP_C_1005X60 98.9,26.3 r0 top
C115 "1uF/10V" CAP_C_1005X60 98.65,17.1 r0 top
C116 "47nF/10V" CAP_C_1005X60 115.5,21.4 r180 top
C117 "47nF/10V" CAP_C_1005X60 115.5,20.4 r180 top
C118 "47nF/10V" CAP_C_1005X60 115.25,12.3 r180 top
C119 "47nF/10V" CAP_C_1005X60 115.25,11.3 r180 top
C120 "4.7uF/10V" CAP_C_1608X80 106.5,23.5 r90 top
C121 "4.7uF/10V" CAP_C_1608X80 98.3,23.4 r90 top
C122 "0.1uF/10V" CAP_C_1005X60 115.3,23.9 r90 top
C123 "0.1uF/10V" CAP_C_1005X60 109.5,23.6 r90 top
C124 "4.7uF/10V" CAP_C_1608X80 116.5,23.5 r90 top
C125 "4.7uF/10V" CAP_C_1608X80 108.3,23.4 r90 top
C126 "0.1uF/10V" CAP_C_1005X60 115.05,14.8 r90 top
C127 "0.1uF/10V" CAP_C_1005X60 109.25,14.5 r90 top
C128 "47nF/10V" CAP_C_1005X60 107.7,8.9 r0 top
C129 "47nF/10V" CAP_C_1005X60 110.5,8.9 r0 top
C130 "0.1uF/10V" CAP_C_1005X60 115.9,27.2 r180 top
C131 "0.1uF/10V" CAP_C_1005X60 115.65,18.1 r180 top
C132 "0.1uF/10V" CAP_C_1005X60 108.9,25.4 r0 top
C133 "0.1uF/10V" CAP_C_1005X60 108.65,16.3 r0 top
C134 "1uF/10V" CAP_C_1005X60 108.15,20.81 r270 top
C135 "1uF/10V" CAP_C_1005X60 108,11.7 r270 top
C136 "1uF/10V" CAP_C_1005X60 108.9,26.3 r0 top
C137 "1uF/10V" CAP_C_1005X60 108.65,17.2 r0 top
C138 "1uF/20V" CAP_C_1005X60 115.7,9.3 r270 bottom
C139 "1uF/20V" CAP_C_1005X60 106.3,9.4 r270 bottom
C140 "1uF/20V" CAP_C_1005X60 109.2,9.475 r270 bottom
C141 "1uF/20V" CAP_C_1005X60 99.2,9.4 r270 bottom
C142 "0.1uF/10V" CAP_C_1005X60 90.1,8.7 r180 top
C143 "0.1uF/10V" CAP_C_1005X60 83.665,16.565 r90 top
C144 "0.1uF/10V" CAP_C_1005X60 85.1,8.7 r180 bottom
C145 "0.1uF/10V" CAP_C_1005X60 90.2,16.7 r90 top
C146 "0.1uF/10V" CAP_C_1005X60 94.7,19.6 r180 bottom
C147 "0.1uF/10V" CAP_C_1005X60 91,20.1 r90 bottom
C148 "0.1uF/10V" CAP_C_1005X60 88.7,11 r180 top
C149 "0.1uF/10V" CAP_C_1005X60 84.9,10.5 r270 top
C150 "0.1uF/10V" CAP_C_1005X60 94,8.7 r180 top
C151 "0.1uF/10V" CAP_C_1005X60 83.665,18.565 r270 top
C152 "0.1uF/10V" CAP_C_1005X60 93.8,8.7 r180 bottom
C153 "0.1uF/10V" CAP_C_1005X60 90.2,18.7 r270 top
C154 "0.1uF/10V" CAP_C_1005X60 94.525,11.125 r180 bottom
C155 "0.1uF/10V" CAP_C_1005X60 91.1,10.6 r270 bottom
C156 "0.1uF/10V" CAP_C_1005X60 88.4,19.4 r180 top
C157 "0.1uF/10V" CAP_C_1005X60 84.9,19.9 r90 top
C158 "0.1uF/10V" CAP_C_1005X60 85.1,8.7 r180 top
C159 "0.1uF/10V" CAP_C_1005X60 83.195,13.735 r270 bottom
C160 "0.1uF/10V" CAP_C_1005X60 90.8,8.7 r180 bottom
C161 "0.1uF/10V" CAP_C_1005X60 89.8,13.5 r270 bottom
C162 "0.1uF/10V" CAP_C_1005X60 88.095,19.535 r180 bottom
C163 "0.1uF/10V" CAP_C_1005X60 84.495,20.035 r90 bottom
C164 "0.1uF/10V" CAP_C_1005X60 95,11 r180 top
C165 "0.1uF/10V" CAP_C_1005X60 91.4,10.5 r270 top
C166 "0.1uF/10V" CAP_C_1005X60 87.6,8.7 r180 top
C167 "0.1uF/10V" CAP_C_1005X60 89.8,11.475 r90 bottom
C168 "0.1uF/10V" CAP_C_1005X60 87.6,8.7 r180 bottom
C169 "0.1uF/10V" CAP_C_1005X60 83.2,11.8 r90 bottom
C170 "0.1uF/10V" CAP_C_1005X60 87.995,11.135 r180 bottom
C171 "0.1uF/10V" CAP_C_1005X60 84.695,10.635 r270 bottom
C172 "0.1uF/10V" CAP_C_1005X60 94.9,19.4 r180 top
C173 "0.1uF/10V" CAP_C_1005X60 91.4,19.9 r90 top
C174 "0.1uF/10V" CAP_C_1005X60 142.2,24.8 r90 bottom
C175 "150pF/10V" CAP_C_1005X60 36.3,37.3 r90 bottom
C176 "0.1uF/10V" CAP_C_1005X60 142.4,50.825 r90 bottom
C177 "100uF/20V" CAP_C_3225X80 119.2,53.1 r270 bottom
C178 "0.1uF/10V" CAP_C_1005X60 28.1,5.2 r270 bottom
C179 "150pF/10V" CAP_C_1005X60 39.1,47.9 r270 bottom
C180 "150pF/10V" CAP_C_1005X60 38.2,47.9 r270 bottom
C181 "20pF/10V" CAP_C_1005X60 111.9,39.3 r180 top
C182 "20pF/10V" CAP_C_1005X60 113.6,41 r90 top
C183 "0.1uF/10V" CAP_C_1005X60 58.7,44.1 r0 bottom
C184 "20pF/10V" CAP_C_1005X60 45.4,49.5 r0 bottom
C185 "20pF/10V" CAP_C_1005X60 43.7,47.9 r270 bottom
C186 "0.1uF/10V" CAP_C_1005X60 78.8,45.7 r90 bottom
C187 "0.1uF/10V" CAP_C_1005X60 47,18.4 r0 top
C188 "0.1uF/10V" CAP_C_1005X60 46.9,14 r0 top
C189 "0.1uF/10V" CAP_C_1005X60 49.4,5.3 r180 bottom
C190 "0.1uF/10V" CAP_C_1005X60 39.3,34.025 r180 bottom
C191 "0.1uF/10V" CAP_C_1005X60 55.725,13.15 r180 top
C192 "0.1uF/10V" CAP_C_1005X60 8.6,12.9 r90 bottom
C193 "0.1uF/10V" CAP_C_1005X60 8.7,17.3 r270 bottom
C194 "1uF/10V" CAP_C_1005X60 9.1,14.7 r0 bottom
C195 "0.1uF/10V" CAP_C_1005X60 9.1,15.6 r0 bottom
C196 "100uF/20V" CAP_C_3225X80 122.4,53.1 r270 bottom
C197 "0.1uF/10V" CAP_C_1005X60 37.6,30.025 r180 bottom
C198 "0.1uF/10V" CAP_C_1005X60 78.8,37.6 r270 bottom
C199 "0.1uF/10V" CAP_C_1005X60 101.7,41.2 r90 top
C200 "0.1uF/10V" CAP_C_1005X60 136.9,56.6 r270 bottom
C201 "0.1uF/10V" CAP_C_1005X60 58.7,40.6 r0 bottom
C202 "0.1uF/10V" CAP_C_1005X60 88,44.2 r270 bottom
C204 "0.1uF/10V" CAP_C_1005X60 98.1,41.3 r90 top
C205 "0.1uF/10V" CAP_C_1005X60 99.1,35.5 r180 top
C206 "10uF/20V" CAP_C_2012X110 109.1,44 r180 top
C207 "0.1uF/16V" CAP_C_1005X60 106.2,43.5 r180 top
C208 "0.1uF/16V" CAP_C_1005X60 106.2,44.6 r180 top
C209 "0.1uF/10V" CAP_C_1005X60 100.5,58.3 r0 top
C210 "0.1uF/10V" CAP_C_1005X60 86.1,35.7 r0 bottom
C211 "0.1uF/10V" CAP_C_1005X60 111.9,38.4 r180 top
C212 "0.1uF/10V" CAP_C_1005X60 101.5,38.8 r0 top
C213 "0.1uF/10V" CAP_C_1005X60 111.9,33.1 r180 top
C214 "1uF/20V" CAP_C_1005X60 101.5,37.9 r0 top
C215 "1uF/20V" CAP_C_1005X60 111.9,37.5 r180 top
C216 "0.1uF/10V" CAP_C_1005X60 111.9,36.6 r180 top
C226 "0.1uF/10V" CAP_C_1005X60 101.5,37 r0 top
C227 "0.1uF/10V" CAP_C_1005X60 55.8,18.6 r180 top
C228 "0.1uF/16V" CAP_C_1005X60 98.5,58.3 r180 top
C229 "0.1uF/10V" CAP_C_1005X60 79.921,32.85 r90 bottom
C230 "150pF/10V" CAP_C_1005X60 109.2,30.1 r90 top
C231 "150pF/10V" CAP_C_1005X60 108.3,30.1 r90 top
C232 "1uF/20V" CAP_C_1005X60 115.717,52.141 r90 top
C233 "2.2nF/10V" CAP_C_1005X60 117.81,56.706 r270 top
C234 "0.1uF/10V" CAP_C_1005X60 126.1,50.1 r90 top
C235 "0.1uF/10V" CAP_C_1005X60 126.5,58.2 r270 top
C236 "150pF/10V" CAP_C_1005X60 107.4,30.1 r90 top
C237 "1uF/20V" CAP_C_1005X60 7.1,52 r90 top
C238 "100uF/20V" CAP_C_3225X80 17.9,28.2 r180 bottom
C239 "150pF/10V" CAP_C_1005X60 106.5,30.1 r90 top
C240 "1uF/20V" CAP_C_1005X60 16.6,52 r90 top
C241 "10uF/20V" CAP_C_2012X110 30.15,34 r180 top
C242 "0.1uF/10V" CAP_C_1005X60 111.9,35.7 r180 top
C243 "0.1uF/10V" CAP_C_1005X60 42.7,47.9 r270 bottom
C244 "0.1uF/10V" CAP_C_1005X60 45.9,37 r180 bottom
C245 "0.1uF/10V" CAP_C_1005X60 37.3,47.9 r270 bottom
C246 "1uF/20V" CAP_C_1005X60 43.5,37.3 r90 bottom
C247 "1uF/20V" CAP_C_1005X60 41.8,47.9 r270 bottom
C248 "0.1uF/10V" CAP_C_1005X60 40.9,47.9 r270 bottom
C249 "0.1uF/10V" CAP_C_1005X60 42.6,37.3 r90 bottom
C250 "0.1uF/10V" CAP_C_1005X60 40,47.9 r270 bottom
C255 "150pF/10V" CAP_C_1005X60 41.7,37.3 r90 bottom
C256 "0.1uF/10V" CAP_C_1005X60 78.5,34.3 r90 bottom
C257 "2.2nF/10V" CAP_C_1005X60 120.31,56.706 r270 top
C259 "100uF/20V" CAP_C_3225X80 13.3,28.2 r0 bottom
C260 "10uF/20V" CAP_C_2012X110 67.8,52.1 r270 bottom
C261 "10uF/20V" CAP_C_2012X110 71.6,52.1 r270 bottom
C262 "10uF/20V" CAP_C_2012X110 77.8,52.1 r270 bottom
C263 "10uF/20V" CAP_C_2012X110 67.7,28.6 r270 bottom
C264 "10uF/20V" CAP_C_2012X110 73.7,28.6 r270 bottom
C265 "10uF/20V" CAP_C_2012X110 79.2,28.6 r270 bottom
C266 "10uF/20V" CAP_C_2012X110 62.3,52.1 r270 bottom
C267 "0.1uF/10V" CAP_C_1005X60 34.2,27.8 r180 bottom
C278 "0.1uF/10V" CAP_C_1005X60 45.8,22.6 r270 bottom
C284 "100uF/20V" CAP_C_3225X80 119.092,43.565 r270 bottom
C285 "100uF/20V" CAP_C_3225X80 122.292,43.565 r270 bottom
C286 "1uF/20V" CAP_C_1005X60 115.593,33.165 r90 top
C287 "2.2nF/10V" CAP_C_1005X60 117.685,47.231 r270 top
C288 "2.2nF/10V" CAP_C_1005X60 120.185,47.231 r270 top
C289 "100uF/20V" CAP_C_3225X80 119.093,34.065 r270 bottom
C290 "100uF/20V" CAP_C_3225X80 122.293,34.065 r270 bottom
C291 "1uF/20V" CAP_C_1005X60 115.6,42.7 r90 top
C292 "2.2nF/10V" CAP_C_1005X60 117.686,37.731 r270 top
C293 "2.2nF/10V" CAP_C_1005X60 120.186,37.731 r270 top
D1 "LED_SMD" LED_0603 17.2,58.8 r180 top
D2 "SS54" DO-214AC_SMA 14.2,53.9 r90 top
D3 "SS54" DO-214AC_SMA 30,52.1 r180 bottom
D4 "SS54" DO-214AC_SMA 23.7,35.1 r90 top
D5 "SS54" DO-214AC_SMA 14.2,35.1 r90 top
D6 "SS54" DO-214AC_SMA 23.7,53.9 r90 top
D7 "SS54" DO-214AC_SMA 14.2,44.6 r90 top
D8 "SS54" DO-214AC_SMA 23.7,44.6 r90 top
D9 "LED_SMD" LED_0603 15.8,29.3 r0 top
D10 "SS54" DO-214AC_SMA 29.85,35.2 r180 bottom
D11 "LED_SMD" LED_0603 8.7,29.2 r0 top
D12 "USBLC6-2SC6" SOT95P280X145-6N 39.6,17.9 r0 top
D13 "SS54" DO-214AC_SMA 122.817,54.041 r90 top
D14 "USBLC6-2SC6" SOT95P280X145-6N 34.7,12.7 r270 top
D15 "USBLC6-2SC6" SOT95P280X145-6N 30.8,12.7 r270 top
D16 "USBLC6-2SC6" SOT95P280X145-6N 24.8,17.4 r180 top
D17 "1N4007FL" SOD3717X145N 77.9,18.9 r180 top value=1N5007
D18 "1N4007FL" SOD3717X145N 65.7,16.6 r0 top value=1N5007
D19 "1N4007FL" SOD3717X145N 70.7,16.6 r0 top value=1N5007
D20 "1N4007FL" SOD3717X145N 75.7,16.6 r0 top value=1N5007
D21 "1N4007FL" SOD3717X145N 80.7,16.6 r0 top value=1N5007
D22 "1N4007FL" SOD3717X145N 71.7,16.6 r180 bottom value=1N5007
D23 "1N4007FL" SOD3717X145N 66.8,16.6 r180 bottom value=1N5007
D24 "1N4007FL" SOD3717X145N 52.8,5.3 r270 bottom value=1N5007
D25 "LED_SMD" LED_0603 28.4,3.3 r90 top
D26 "1N5819HW-7-F" SOD3717X145N 41.2,32.225 r180 bottom
D27 "SS54" DO-214AC_SMA 112.7,46.7 r90 top
D28 "1N5819HW-7-F" SOD3717X145N 108.5,46.2 r0 top
D29 "USBLC6-2SC6" SOT95P280X145-6N 37.1,4 r0 bottom
D30 "SS54" DO-214AC_SMA 122.692,44.565 r90 top
D31 "SS54" DO-214AC_SMA 122.693,35.065 r90 top
D32 "1N4007FL" SOD3717X145N 118.5,6.8 r180 bottom value=1N5007
D33 "1N4007FL" SOD3717X145N 118.5,4.4 r180 bottom value=1N5007
D34 "1N4007FL" SOD3717X145N 97.6,10.6 r270 bottom value=1N5007
D35 "1N4007FL" SOD3717X145N 107.8,12.4 r270 bottom value=1N5007
D36 "LED_SMD" LED_0603 9.5,58.8 r180 top
DZ1 "KDZLVTFTR51" SOD3717X145N 72.9,18.9 r0 top
DZ2 "KDZLVTFTR51" SOD3717X145N 65.7,14.2 r0 top
DZ3 "KDZLVTFTR51" SOD3717X145N 70.7,14.2 r0 top
DZ4 "KDZLVTFTR51" SOD3717X145N 75.7,14.2 r0 top
DZ5 "KDZLVTFTR51" SOD3717X145N 80.7,14.2 r0 top
DZ6 "KDZLVTFTR51" SOD3717X145N 71.7,14.2 r180 bottom
DZ7 "KDZLVTFTR51" SOD3717X145N 66.8,14.2 r180 bottom
DZ8 "KDZLVTFTR51" SOD3717X145N 55.1,5.3 r270 bottom
H1 "M3" HEX-M3 4,62 r0 top
H2 "M3" HEX-M3 146,62 r0 top
H3 "M3" HEX-M3 146,4 r0 top
H4 "M3" HEX-M3 4,4 r0 top
H5 "M3" HEX-M3 50,52 r0 top
H6 "M3" HEX-M3 94,28 r0 top
H7 "M3" HEX-M3 50,28 r0 top
H8 "M3" HEX-M3 94,52 r0 top
H9 "M3" Testpoint_TH_D400H200 57,47 r0 top
H10 "M3" Testpoint_TH_D400H200 87,33 r0 top
J1 "0533980271" MOLEX_0533980271 15.5,23.2 r0 bottom
J2 "5040500991" MOLEX_5040500991 18,4 r180 top locked
J3 "5040500891" MOLEX_5040500891 88,4 r0 bottom
J4 "5040500891" MOLEX_5040500891 70,4 r180 top
J5 "0533980971" MOLEX_0533980971 120,19 r90 bottom
J6 "5040500891" MOLEX_5040500891 70,4 r0 bottom
J7 "0533981171" MOLEX_0533981171 126,19 r90 bottom
J8 "1825059-1" SW_1825059-1 41,43.525 r180 top locked
J9 "0533980471" MOLEX_0533980471 39,17.1 r0 bottom
J10 "0533980471" MOLEX_0533980471 39,11.1 r0 bottom
J11 "0533980471" MOLEX_0533980471 26.7,11.1 r0 bottom
J12 "0533980471" MOLEX_0533980471 26.7,17.1 r0 bottom
J13 "5040500891" MOLEX_5040500891 106,4 r0 bottom
J14 "5040500891" MOLEX_5040500891 106,4 r180 top
J15 "HEADER" MOLEX_0533981571 100,41 r90 bottom
J16 "FLOW_SENSOR" MOLEX_0533980671 52.6,17.1 r0 bottom locked
J18 "0473460001" 47346-0001_MOL 34,3 r0 top locked
J19 "0533980471" MOLEX_0533980471 39,23.2 r0 bottom
J20 "HEADER 5x1" CONN_54202-T0805ALF 40.93,32.84 r90 top
J21 "Molex_1051620001" MOLEX_1051620001 14.32,15.35 r270 top
J22 "5040500491" MOLEX_5040500491 55,4 r180 top
J23 "0533980271" MOLEX_0533980271 108,46.5 r0 bottom
J24 "0533980471" MOLEX_0533980471 26.7,23.2 r0 bottom
J25 "0533980271" MOLEX_0533980271 107.9,39.1 r0 bottom
J26 "5040500891" MOLEX_5040500891 132,4 r180 top
J27 "FLOW_SENSOR" MOLEX_0533980671 52.7,11.1 r0 bottom locked
J29 "5040500891" MOLEX_5040500891 88,4 r180 top
JP1 "DNP/0R" RES_C_1608X60 7.393,55.565 r90 top
JP2 "DNP/0R" RES_C_1608X60 16.893,36.665 r90 top
JP3 "DNP/0R" RES_C_1608X60 7.393,36.665 r90 top
JP4 "DNP/0R" RES_C_1608X60 16.893,55.465 r90 top
JP5 "DNP/0R" RES_C_1608X60 7.393,46.165 r90 top
JP6 "DNP/0R" RES_C_1608X60 16.893,46.165 r90 top
JP7 "DNP/0R" RES_C_1608X60 116.01,55.606 r90 top
JP8 "DNP/0R" RES_C_1608X60 115.885,46.131 r90 top
JP9 "DNP/0R" RES_C_1608X60 115.886,36.631 r90 top
JP10 "DNP/0R" RES_C_1608X60 32.4,7.8 r180 top
L1 "15uH/3A" IND730660x480 30.2,46.2 r180 top
L2 "15uH/3A" IND730660x480 30.05,29.2 r180 top
L3 "1uH" L-SMD-M-3.5x3.5x2mm 101.25,20.7 r90 top
L4 "1uH" L-SMD-M-3.5x3.5x2mm 101.05,11.5 r90 top
L5 "1uH" L-SMD-M-3.5x3.5x2mm 111.25,20.71 r90 top
L6 "1uH" L-SMD-M-3.5x3.5x2mm 111,11.6 r90 top
L7 "10uH" IND_C_2012X65 99.05,37.725 r270 top value=1.5uH
L8 "82uH" L-SMD-M-4.8x4.8x2.8mm 109.9,53.3 r90 top
P1 "Hirose DF40C-100DP-0.4V (1.5mm / 3.0mm stacking heights)" B2B04M2X50R 73.025,28.15 r180 top
P2 "Hirose DF40C-100DP-0.4V (1.5mm / 3.0mm stacking heights)" B2B04M2X50R 70.979,51.68 r180 top
Q1 "AO3400A" SOT95P240X120-3N 113.2,20.1 r180 bottom
Q2 "AO3400A" SOT95P240X120-3N 102.5,10.2 r180 bottom
Q3 "AO3400A" SOT95P240X120-3N 112.4,10.3 r180 bottom
Q4 "AO3400A" SOT95P240X120-3N 102.8,19.9 r180 bottom
Q5 "AO3400A" SOT95P240X120-3N 68.3,19.5 r180 top
Q6 "AO3400A" SOT95P240X120-3N 75.2,11.3 r180 top
Q7 "AO3400A" SOT95P240X120-3N 80.2,11.3 r180 top
Q8 "AO3400A" SOT95P240X120-3N 65.2,11.3 r180 top
Q9 "AO3400A" SOT95P240X120-3N 70.2,11.3 r180 top
Q10 "AO3400A" SOT95P240X120-3N 72.2,11.3 r0 bottom
Q11 "AO3400A" SOT95P240X120-3N 67.3,11.3 r0 bottom
Q12 "AO3400A" SOT95P240X120-3N 58,5.8 r90 bottom
R1 "470k" RES_C_1005X40 7.993,51.965 r90 top
R2 "47k" RES_C_1005X40 26.85,52 r90 top
R3 "10k/1%" RES_C_1005X40 26.85,58 r90 top
R4 "47k" RES_C_1005X40 11.593,49.965 r270 top
R5 "47k" RES_C_1005X40 12.493,49.965 r270 top
R6 "11k" RES_C_1005X40 7.993,49.965 r90 top
R7 "47k" RES_C_1005X40 9.793,49.965 r90 top
R8 "3.16k/1%" RES_C_1005X40 26.85,56 r90 top
R9 "1k" RES_C_1005X40 19.925,58.8 r180 top
R10 "1.6k" RES_C_1005X40 10.093,56.665 r270 top
R11 "470k" RES_C_1005X40 17.5,33.2 r90 top
R12 "47k" RES_C_1005X40 21.1,31 r270 top
R13 "47k" RES_C_1005X40 22,31 r270 top
R14 "470k" RES_C_1005X40 8,33.2 r90 top
R15 "22R" RES_C_1005X40 18.8,31 r270 top
R16 "47k" RES_C_1005X40 11.6,31 r270 top
R17 "47k" RES_C_1005X40 12.5,31 r270 top
R18 "22R" RES_C_1005X40 9.3,31 r270 top
R19 "DNP/10k" RES_C_1005X40 17.9,31 r270 top
R20 "133k" RES_C_1005X40 16.6,31.1 r270 top
R21 "DNP/10k" RES_C_1005X40 8.4,31 r270 top
R22 "10k" RES_C_1005X40 19.7,31 r270 top
R23 "47k" RES_C_1005X40 7.1,31 r270 top
R24 "10k" RES_C_1005X40 10.2,31 r270 top
R25 "1.6k" RES_C_1005X40 19.593,37.765 r270 top
R26 "1.6k" RES_C_1005X40 10.093,37.765 r270 top
R27 "DNP/10k" RES_C_1005X40 18.8,49.8 r270 top
R28 "470k" RES_C_1005X40 17.5,52 r90 top
R29 "47k" RES_C_1005X40 21.1,49.8 r270 top
R30 "47k" RES_C_1005X40 22,49.8 r270 top
R31 "22R" RES_C_1005X40 17.9,49.8 r270 top
R32 "10k" RES_C_1005X40 19.7,49.8 r270 top
R33 "470k" RES_C_1005X40 8,42.7 r90 top
R34 "133k" RES_C_1005X40 16.6,49.8 r270 top
R35 "47k" RES_C_1005X40 11.6,40.5 r270 top
R36 "47k" RES_C_1005X40 12.5,40.5 r270 top
R37 "22R" RES_C_1005X40 9.3,40.5 r270 top
R38 "DNP/10k" RES_C_1005X40 8.4,40.5 r270 top
R39 "47k" RES_C_1005X40 7.1,40.5 r270 top
R40 "10k" RES_C_1005X40 10.2,40.5 r270 top
R41 "1.6k" RES_C_1005X40 19.593,56.565 r270 top
R42 "1.6k" RES_C_1005X40 10.093,47.265 r270 top
R43 "DNP/10k" RES_C_1005X40 18.8,40.5 r270 top
R44 "470k" RES_C_1005X40 17.5,42.7 r90 top
R45 "47k" RES_C_1005X40 21.1,40.5 r270 top
R46 "47k" RES_C_1005X40 22,40.5 r270 top
R47 "22R" RES_C_1005X40 17.9,40.5 r270 top
R48 "10k" RES_C_1005X40 19.7,40.5 r270 top
R49 "133k" RES_C_1005X40 16.6,40.5 r270 top
R50 "47k" RES_C_1005X40 26.7,35.1 r90 top
R51 "10k/1%" RES_C_1005X40 26.7,41.1 r90 top
R52 "1.6k" RES_C_1005X40 19.593,47.265 r270 top
R53 "3.16k/1%" RES_C_1005X40 26.7,39.1 r90 top
R54 "1k" RES_C_1005X40 13.3,29.6 r0 top
R55 "1k" RES_C_1005X40 32.4,43.4 r0 bottom
R56 "1k" RES_C_1005X40 6.2,29.2 r0 top
R57 "22R" RES_C_1005X40 119,21.1 r180 top
R58 "22R" RES_C_1005X40 119,20.2 r180 top
R59 "22R" RES_C_1005X40 119,19.3 r180 top
R60 "22R" RES_C_1005X40 119,18.4 r180 top
R61 "22R" RES_C_1005X40 119,15.7 r180 top
R62 "22R" RES_C_1005X40 119,14.8 r180 top
R63 "22R" RES_C_1005X40 119,12.1 r180 top
R64 "22R" RES_C_1005X40 124.6,22.875 r180 top
R65 "22R" RES_C_1005X40 124.6,22 r180 top
R66 "22R" RES_C_1005X40 124.6,21.1 r180 top
R67 "22R" RES_C_1005X40 124.6,20.2 r180 top
R68 "22R" RES_C_1005X40 124.6,17.5 r180 top
R69 "22R" RES_C_1005X40 124.6,16.6 r180 top
R70 "22R" RES_C_1005X40 80.7,27.3 r270 bottom
R71 "22R" RES_C_1005X40 124.6,13 r180 top
R72 "10k" RES_C_1005X40 49.4,22.6 r270 bottom
R73 "0R" RES_C_1005X40 40.3,54.1 r90 bottom
R74 "22R" RES_C_1005X40 70.6,22.5 r270 bottom
R75 "22R" RES_C_1005X40 67.5,22.5 r270 bottom
R76 "0R" RES_C_1005X40 40,56.7 r90 bottom
R77 "DNP/0R" RES_C_1005X40 38.665,56.739 r90 bottom
R78 "DNP/0R" RES_C_1005X40 39.1,51.7 r90 bottom
R79 "0R" RES_C_1005X40 64.2,29.3 r90 bottom
R80 "DNP/0R" RES_C_1005X40 42.7,51.7 r90 bottom
R81 "0R" RES_C_1005X40 65.2,29.3 r90 bottom
R82 "1k" RES_C_1005X40 40.3,51.7 r270 bottom
R83 "1k" RES_C_1005X40 41.5,51.7 r270 bottom
R84 "10k" RES_C_1005X40 119,17.5 r0 top
R85 "10k" RES_C_1005X40 119,16.6 r0 top
R86 "10k" RES_C_1005X40 124.6,19.3 r0 top
R87 "10k" RES_C_1005X40 124.6,18.4 r0 top
R88 "10k" RES_C_1005X40 124.6,15.7 r0 top
R89 "1.6k" RES_C_1005X40 80.821,32.85 r90 bottom
R90 "22R" RES_C_1005X40 47.6,22.6 r90 bottom
R91 "10k" RES_C_1005X40 34.2,31.5 r180 bottom
R92 "10k" RES_C_1005X40 34.2,28.7 r180 bottom
R93 "22R" RES_C_1005X40 69.1,33.5 r90 bottom
R94 "22R" RES_C_1005X40 124.6,13.9 r180 top
R95 "22R" RES_C_1005X40 16.6,3.1 r270 bottom
R96 "60.4R" RES_C_1005X40 9.8,8.5 r270 bottom
R97 "22R" RES_C_1005X40 124.6,12.1 r180 top
R98 "60.4R" RES_C_1005X40 11.6,8.5 r90 bottom
R99 "4.7k" RES_C_1005X40 14.7,27.2 r270 top
R100 "4.7k" RES_C_1005X40 13.8,27.2 r270 top
R101 "DNP/4.7k" RES_C_1005X40 8.1,27.4 r270 top
R102 "DNP/4.7k" RES_C_1005X40 7.2,27.4 r270 top
R103 "22R" RES_C_1005X40 13.8,25 r270 top
R104 "22R" RES_C_1005X40 7.2,25.3 r90 top
R105 "22R" RES_C_1005X40 14.7,25 r270 top
R106 "22R" RES_C_1005X40 8.1,25.3 r90 top
R107 "22R" RES_C_1005X40 15.6,25 r270 top
R108 "10k" RES_C_1005X40 15.6,27.2 r270 top
R109 "4.7k" RES_C_1005X40 77.5,18.1 r270 bottom
R110 "DNP/0R" RES_C_1005X40 38.6,8.7 r0 top
R111 "4.7k" RES_C_1005X40 76.6,18.1 r270 bottom
R112 "4.7k" RES_C_1005X40 82.2,18.2 r270 bottom
R113 "4.7k" RES_C_1005X40 83.1,18.2 r270 bottom
R114 "10k" RES_C_1005X40 35.4,20.1 r0 top
R115 "10k" RES_C_1005X40 29.1,18.9 r180 top
R116 "10k" RES_C_1005X40 29.1,18 r180 top
R117 "10k" RES_C_1005X40 45.2,15.875 r90 top
R118 "10k" RES_C_1005X40 43.3,8.7 r180 top
R119 "DNP/0R" RES_C_1005X40 38.6,15.4 r180 top
R120 "10k" RES_C_1005X40 27.2,15.3 r180 top
R121 "10k" RES_C_1005X40 27.2,8.7 r180 top
R122 "10k" RES_C_1005X40 129.5,58.2 r90 top
R123 "22R" RES_C_1005X40 70.2,59 r0 bottom
R124 "DNP/0R" RES_C_1005X40 20.1,8.8 r0 top
R125 "10k" RES_C_1005X40 105.4,41.4 r90 top
R126 "DNP/0R" RES_C_1005X40 22,15.3 r180 top
R127 "22R" RES_C_1005X40 48.5,22.6 r90 bottom
R128 "10k" RES_C_1005X40 46.7,22.6 r270 bottom
R129 "10k" RES_C_1005X40 103.9,27.2 r180 top
R130 "10k" RES_C_1005X40 103.65,18.1 r180 top
R131 "22R" RES_C_1005X40 105.9,26.3 r180 top
R132 "22R" RES_C_1005X40 105.65,17.2 r180 top
R133 "22R" RES_C_1005X40 100.9,27.2 r0 top
R134 "22R" RES_C_1005X40 100.65,18.1 r0 top
R135 "10k" RES_C_1005X40 105.9,25.4 r0 top
R136 "10k" RES_C_1005X40 98.9,27.2 r180 top
R137 "10k" RES_C_1005X40 105.65,16.3 r0 top
R138 "10k" RES_C_1005X40 98.65,18 r180 top
R139 "10k" RES_C_1005X40 113.9,27.2 r180 top
R140 "10k" RES_C_1005X40 113.65,18.1 r180 top
R141 "22R" RES_C_1005X40 115.9,26.3 r180 top
R142 "22R" RES_C_1005X40 115.65,17.2 r180 top
R143 "22R" RES_C_1005X40 110.9,27.3 r0 top
R144 "22R" RES_C_1005X40 110.65,18.1 r0 top
R145 "10k" RES_C_1005X40 115.9,25.4 r0 top
R146 "10k" RES_C_1005X40 108.9,27.3 r180 top
R147 "10k" RES_C_1005X40 115.65,16.3 r0 top
R148 "10k" RES_C_1005X40 108.65,18.1 r180 top
R149 "120R" RES_C_1005X40 112.1,22.4 r0 bottom
R150 "120R" RES_C_1005X40 101.4,12.5 r0 bottom
R151 "10k" RES_C_1005X40 114.3,22.4 r180 bottom
R152 "10k" RES_C_1005X40 103.6,12.5 r180 bottom
R153 "120R" RES_C_1005X40 111.525,12.4 r0 bottom
R154 "120R" RES_C_1005X40 101.7,22.2 r0 bottom
R155 "10k" RES_C_1005X40 113.7,12.4 r180 bottom
R156 "10k" RES_C_1005X40 103.9,22.2 r180 bottom
R157 "22R" RES_C_1005X40 92.1,20.1 r90 bottom
R158 "22R" RES_C_1005X40 93.1,20.1 r270 bottom
R159 "22R" RES_C_1005X40 85.9,10.5 r270 top
R160 "22R" RES_C_1005X40 87.2,10.5 r90 top
R161 "10k" RES_C_1005X40 94.7,20.6 r180 bottom
R162 "10k" RES_C_1005X40 88.7,10 r180 top
R163 "22R" RES_C_1005X40 92.1,10.6 r270 bottom
R164 "22R" RES_C_1005X40 93.1,10.6 r90 bottom
R165 "22R" RES_C_1005X40 85.9,19.9 r90 top
R166 "22R" RES_C_1005X40 86.9,19.9 r270 top
R167 "10k" RES_C_1005X40 94.525,10.075 r180 bottom
R168 "10k" RES_C_1005X40 88.4,20.4 r180 top
R169 "22R" RES_C_1005X40 85.695,20.035 r90 bottom
R170 "22R" RES_C_1005X40 86.595,20.035 r270 bottom
R171 "22R" RES_C_1005X40 92.3,10.5 r270 top
R172 "22R" RES_C_1005X40 93.5,10.5 r90 top
R173 "10k" RES_C_1005X40 88.095,20.435 r180 bottom
R174 "10k" RES_C_1005X40 95,10.1 r180 top
R175 "22R" RES_C_1005X40 85.595,10.635 r270 bottom
R176 "22R" RES_C_1005X40 86.495,10.635 r90 bottom
R177 "22R" RES_C_1005X40 92.5,19.9 r90 top
R178 "22R" RES_C_1005X40 93.4,19.9 r270 top
R179 "10k" RES_C_1005X40 87.995,10.235 r180 bottom
R180 "10k" RES_C_1005X40 94.9,20.3 r180 top
R181 "DNP/4.7k" RES_C_1005X40 141.9,20 r270 bottom
R182 "DNP/4.7k" RES_C_1005X40 142,43.3 r270 bottom
R183 "DNP/4.7k" RES_C_1005X40 142.8,20 r270 bottom
R184 "DNP/4.7k" RES_C_1005X40 142.9,43.3 r270 bottom
R185 "DNP/4.7k" RES_C_1005X40 141.9,17.3 r270 bottom
R186 "DNP/4.7k" RES_C_1005X40 142,46.3 r270 bottom
R187 "DNP/4.7k" RES_C_1005X40 142.8,17.3 r270 bottom
R188 "DNP/4.7k" RES_C_1005X40 142.9,46.3 r270 bottom
R189 "22R" RES_C_1005X40 70.2,58.1 r0 bottom
R190 "22R" RES_C_1005X40 72.7,57.5 r0 bottom
R191 "4.7k" RES_C_1005X40 127,50.1 r270 top
R192 "4.7k" RES_C_1005X40 129.7,50.1 r270 top
R193 "22R" RES_C_1005X40 72.7,56.6 r0 bottom
R194 "22R" RES_C_1005X40 68.2,48.6 r0 bottom
R195 "22R" RES_C_1005X40 68.2,47.7 r0 bottom
R196 "22R" RES_C_1005X40 71.5,22.5 r90 bottom
R197 "4.7k" RES_C_1005X40 65.2,18.2 r180 top
R198 "4.7k" RES_C_1005X40 77.7,9.8 r270 top
R199 "4.7k" RES_C_1005X40 82.7,9.8 r270 top
R200 "4.7k" RES_C_1005X40 67.7,9.8 r270 top
R201 "4.7k" RES_C_1005X40 72.7,9.8 r270 top
R202 "10k" RES_C_1005X40 65.2,19.1 r0 top
R203 "10k" RES_C_1005X40 77.7,11.8 r270 top
R204 "10k" RES_C_1005X40 82.7,11.8 r270 top
R205 "10k" RES_C_1005X40 67.7,11.8 r270 top
R206 "10k" RES_C_1005X40 72.7,11.8 r270 top
R207 "4.7k" RES_C_1005X40 69.7,9.8 r270 bottom
R208 "4.7k" RES_C_1005X40 64.8,9.8 r270 bottom
R209 "4.7k" RES_C_1005X40 59.3,3.3 r0 bottom
R210 "10k" RES_C_1005X40 69.7,11.8 r270 bottom
R211 "10k" RES_C_1005X40 64.8,11.8 r270 bottom
R212 "10k" RES_C_1005X40 57.3,3.3 r0 bottom
R213 "4.7k" RES_C_1005X40 46.9,11.3 r0 top
R214 "4.7k" RES_C_1005X40 46.9,12.2 r0 top
R215 "4.7k" RES_C_1005X40 55.675,11.3 r180 top
R216 "4.7k" RES_C_1005X40 55.7,12.2 r180 top
R217 "22R" RES_C_1005X40 46.9,13.1 r180 top
R218 "22R" RES_C_1005X40 46.9,10.4 r180 top
R219 "22R" RES_C_1005X40 53.6,10.3 r180 top
R220 "22R" RES_C_1005X40 53.6,15.3 r180 top
R221 "10k" RES_C_1005X40 55.6,10.3 r0 top
R222 "4.7k" RES_C_1005X40 55.8,16.5 r180 top
R223 "4.7k" RES_C_1005X40 55.8,17.4 r180 top
R224 "10k" RES_C_1005X40 55.8,15.3 r0 top
R225 "1k" RES_C_1005X40 32.2,3 r270 bottom
R226 "4.7k" RES_C_1005X40 30.3,3.9 r0 bottom
R227 "4.7k" RES_C_1005X40 30.3,4.8 r0 bottom
R228 "4.7k" RES_C_1005X40 30.3,3 r180 bottom
R229 "4.7k" RES_C_1005X40 30.3,5.7 r180 bottom
R230 "4.7k" RES_C_1005X40 49.4,3.5 r180 bottom
R231 "4.7k" RES_C_1005X40 49.4,4.4 r180 bottom
R232 "DNP/10k" RES_C_1005X40 19.1,18.6 r0 bottom
R233 "DNP/10k" RES_C_1005X40 19.1,17.7 r0 bottom
R234 "DNP/10k" RES_C_1005X40 19.1,11.4 r0 bottom
R235 "DNP/10k" RES_C_1005X40 19.1,10.5 r0 bottom
R236 "DNP/10k" RES_C_1005X40 19.1,15 r0 bottom
R237 "DNP/10k" RES_C_1005X40 19.1,14.1 r0 bottom
R238 "DNP/0R" RES_C_1005X40 37.6,31.8 r270 bottom
R239 "0R" RES_C_1005X40 37.6,33.9 r270 bottom
R240 "0R" RES_C_1005X40 19.6,7.8 r90 bottom
R241 "DNP/0R" RES_C_1005X40 18.6,7.8 r270 bottom
R242 "0R" RES_C_1005X40 19.1,19.5 r180 bottom
R243 "0R" RES_C_1005X40 19.1,16.8 r180 bottom
R244 "0R" RES_C_1005X40 44,28.125 r0 bottom
R245 "0R" RES_C_1005X40 19.1,12.3 r180 bottom
R246 "DNP/10k" RES_C_1005X40 44,29.125 r0 bottom
R247 "0R" RES_C_1005X40 19.1,9.6 r180 bottom
R248 "10k" RES_C_1005X40 11.1,10.1 r0 bottom
R249 "0R" RES_C_1005X40 19.1,15.9 r180 bottom
R250 "0R" RES_C_1005X40 19.1,13.2 r180 bottom
R251 "DNP/0R" RES_C_1005X40 37.6,28.025 r180 bottom
R252 "DNP/0R" RES_C_1005X40 37.6,29.025 r180 bottom
R253 "22R" RES_C_1005X40 34.2,30.6 r0 bottom
R254 "22R" RES_C_1005X40 34.2,29.6 r0 bottom
R255 "10k" RES_C_1005X40 124.6,14.8 r0 top
R256 "10k" RES_C_1005X40 119,13.9 r0 top
R257 "DNP/22R" RES_C_1005X40 18.9,3.1 r270 bottom
R258 "22R" RES_C_1005X40 68.2,33.5 r90 bottom